# Altium PCB PCB1.PcbDoc (part 1 of 3)
Units mm, origin at the board's own origin, x right, y up, seen from the top; angles counter-clockwise.
Board outline 77.5 x 89.25 mm, 4 copper layers (Top Layer, Layer 1, Layer 2, Bottom Layer), stack 0.603 mm thick; 122 components, 112 nets, 561 pads, 302 vias.
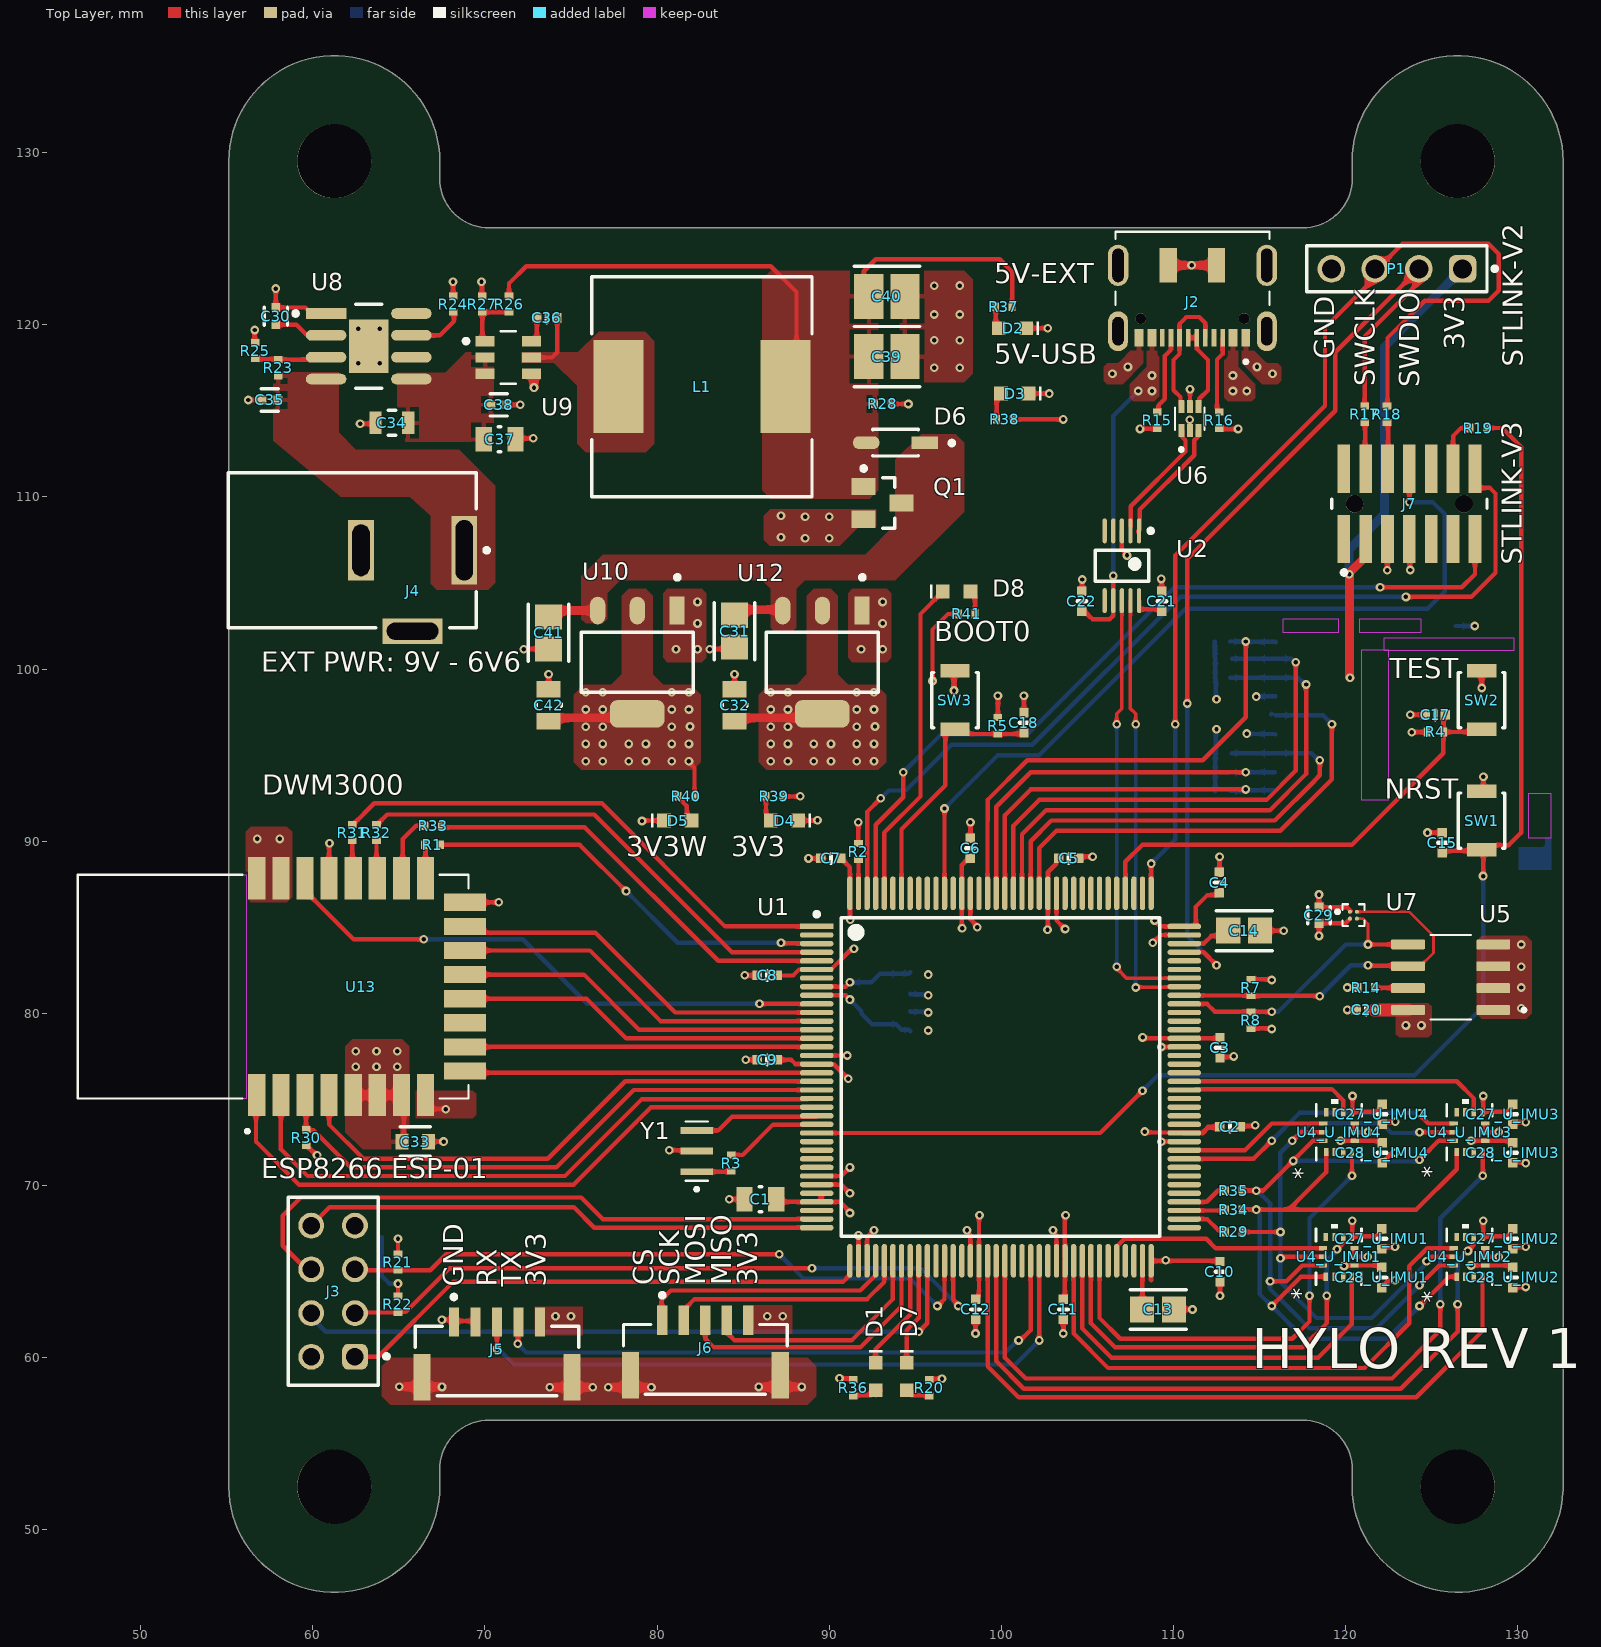
[diagram p0: Top Layer view]
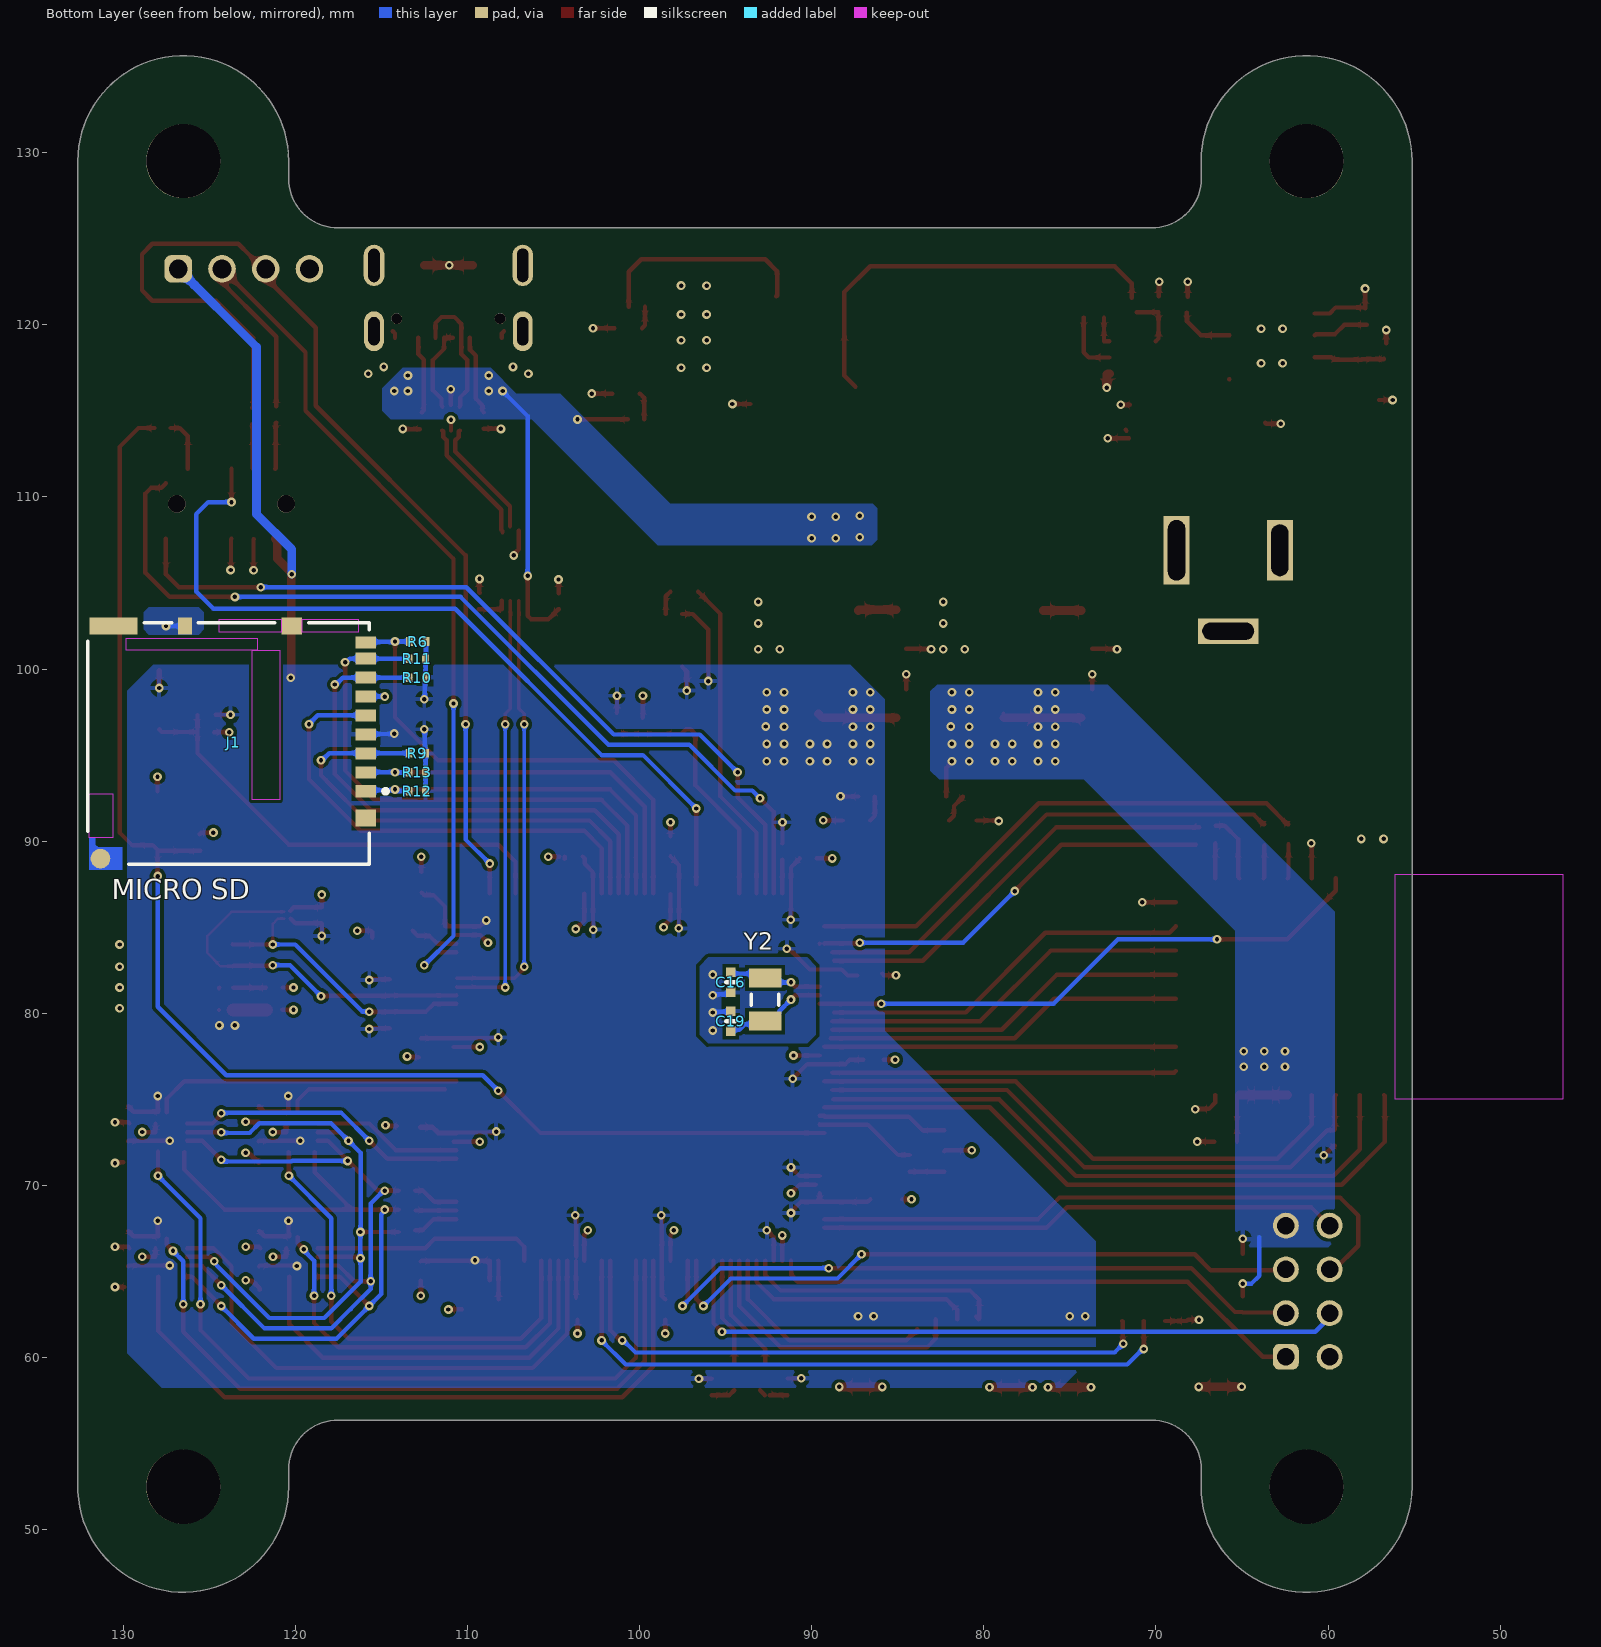
[diagram p1: Bottom Layer view, seen from below]
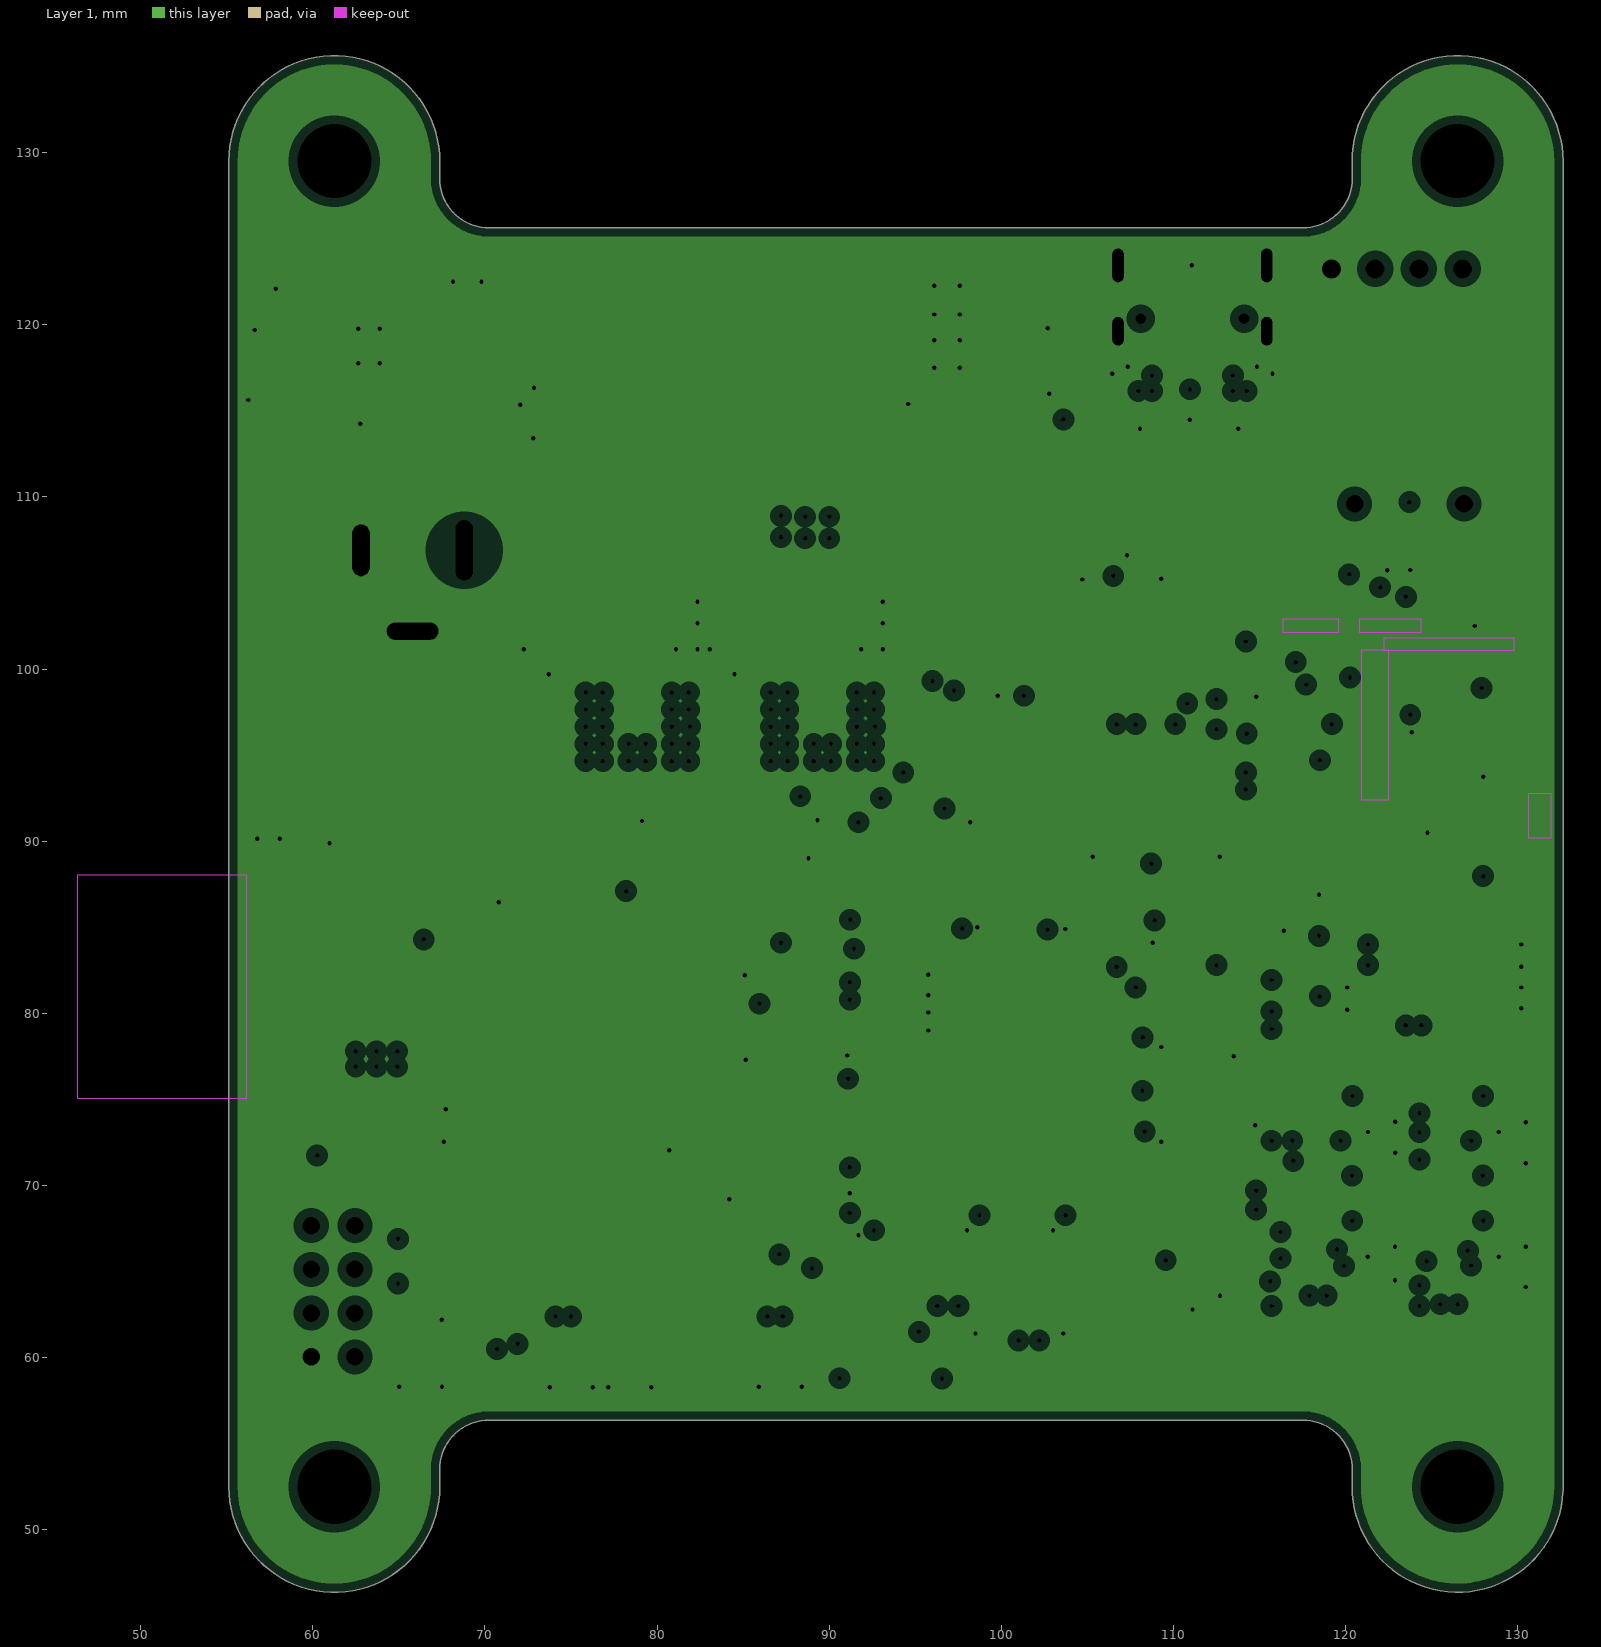
[diagram p2: Layer 1, clearances drawn from the general rule]
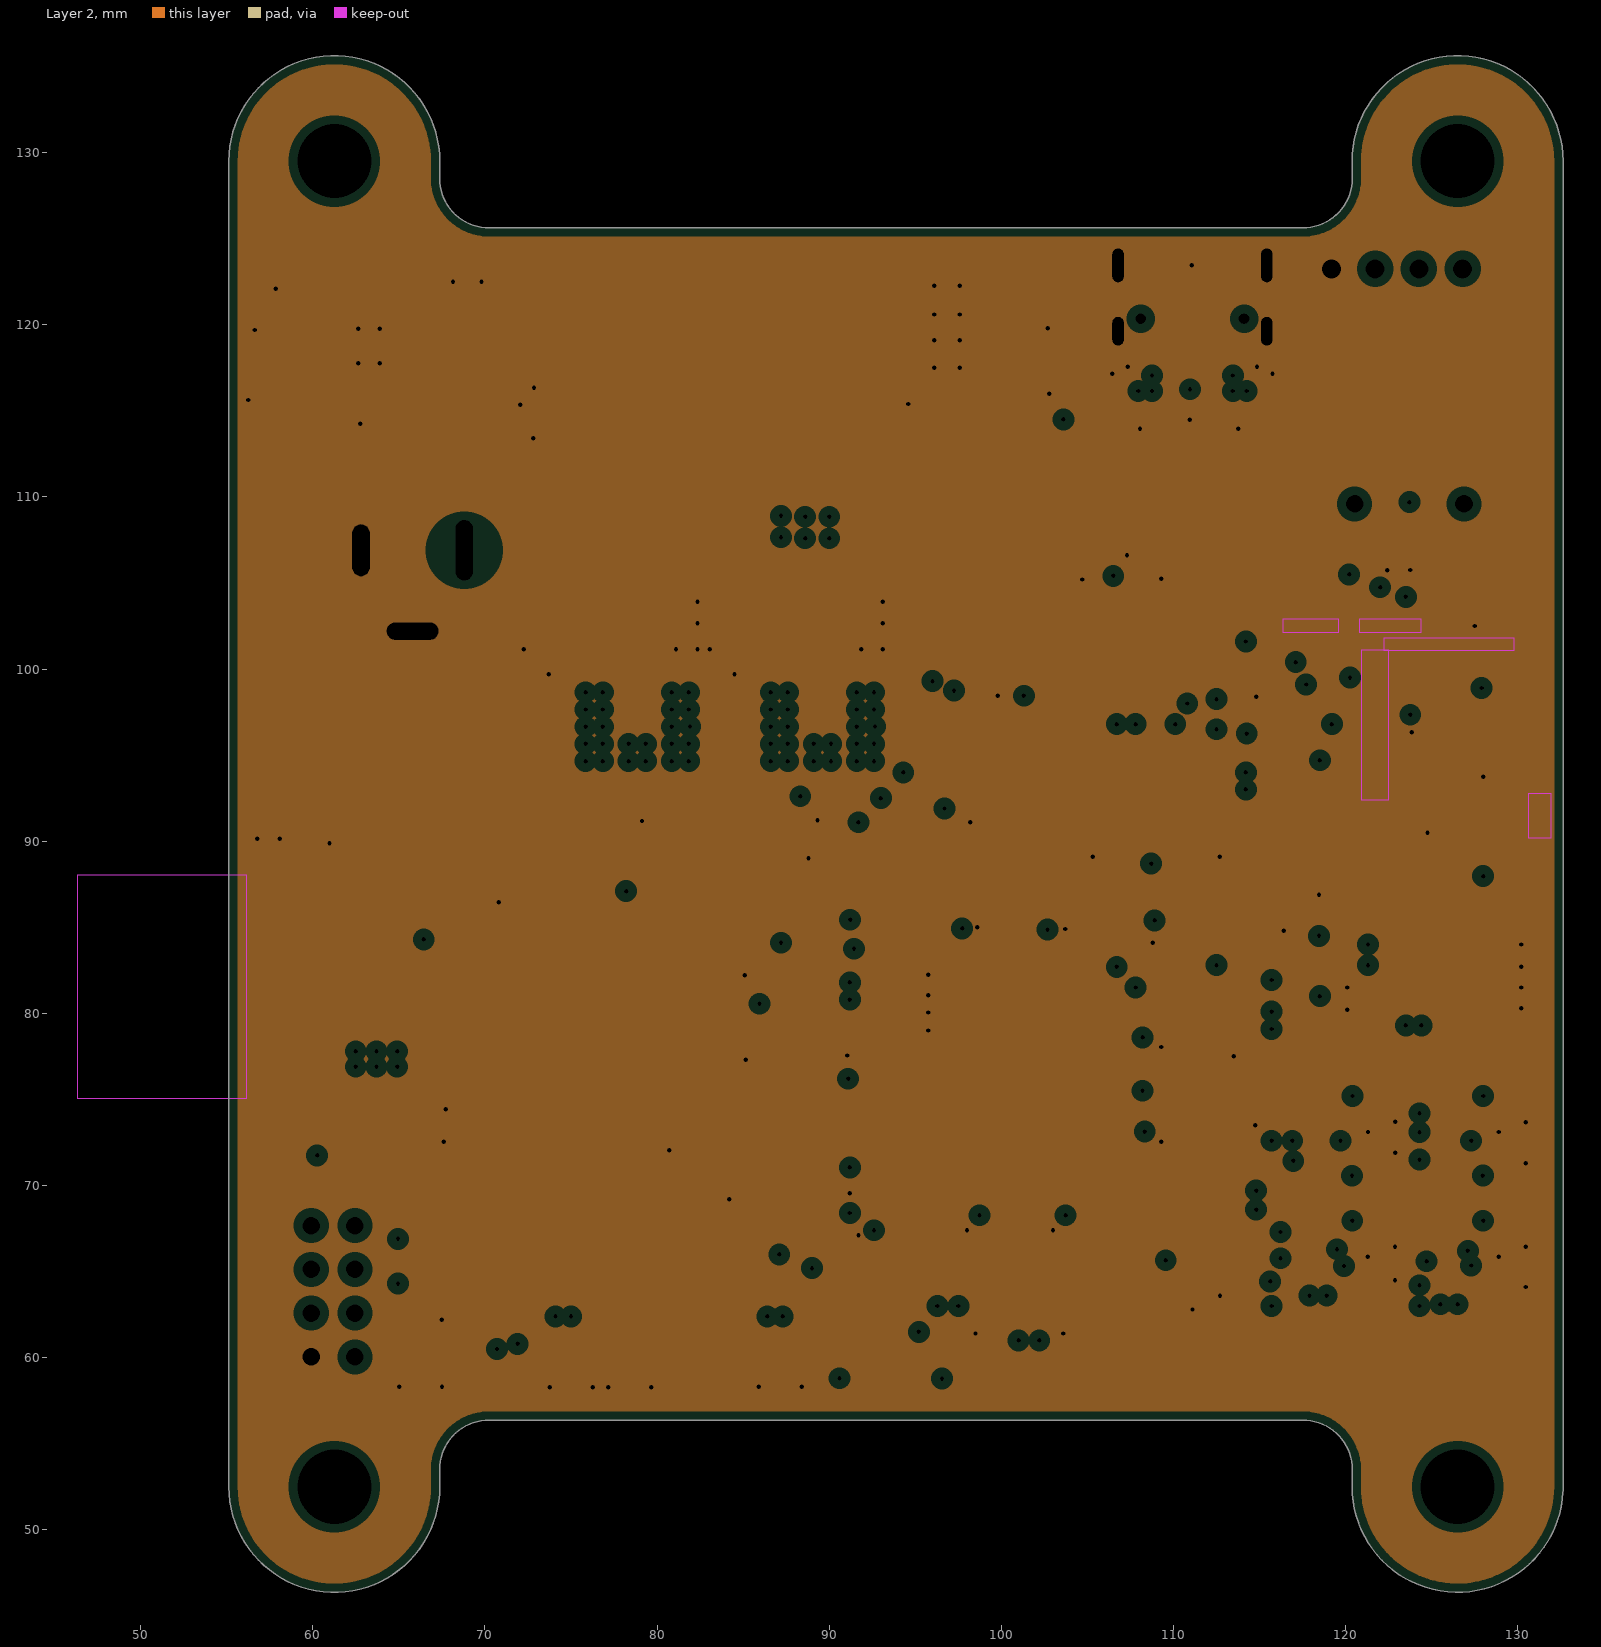
[diagram p3: Layer 2, clearances drawn from the general rule]
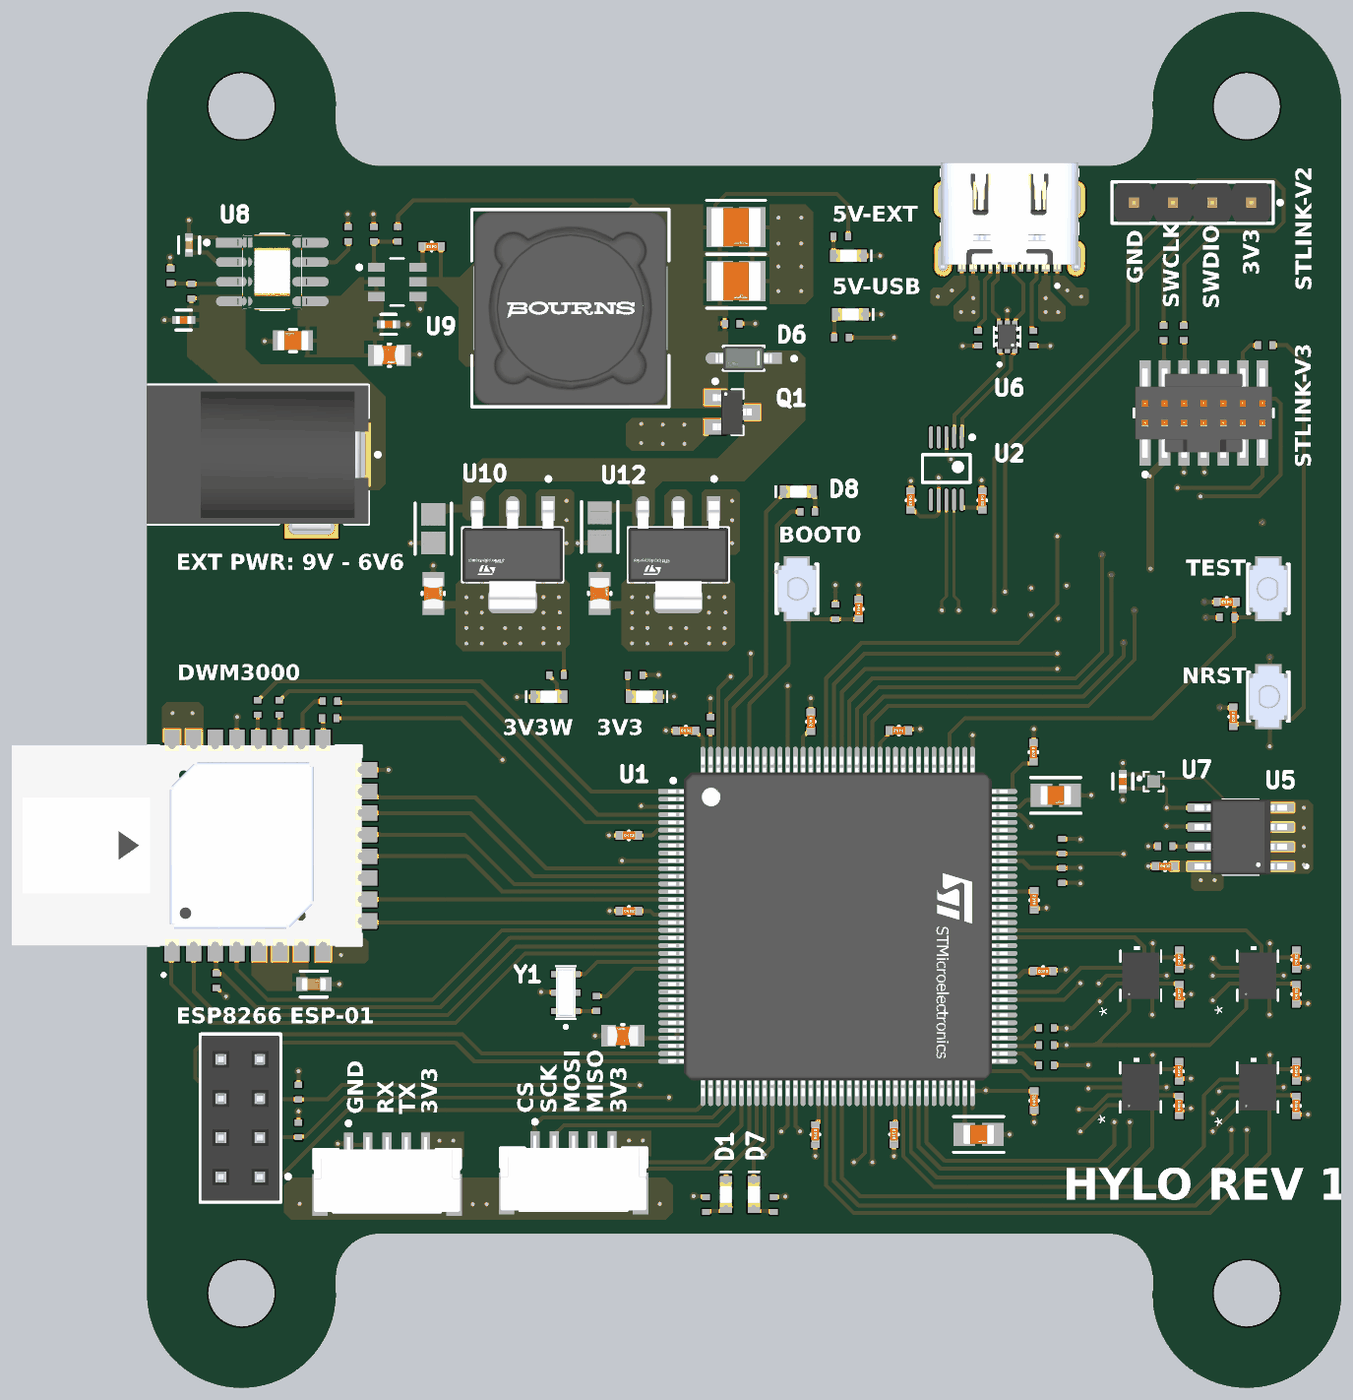
[diagram p5: 3D render of the assembled board from above, using the file's embedded part models]

## Layer stack, top to bottom
Top Solder: solder mask 0.0102, Solder Resist, Dk 3.5
Top Layer: signal copper 0.0356
Dielectric 2: prepreg 0.0711, PP-006, Dk 4.1
Layer 1: plane copper 0.035, net GND
Dielectric 1: dielectric 0.32, FR-4, Dk 4.8
Layer 2: plane copper 0.035, net GND
Dielectric 3: prepreg 0.0711, PP-006, Dk 4.1
Bottom Layer: signal copper 0.0356
Bottom Solder: solder mask 0.0102, Solder Resist, Dk 3.5

## Board outline
55.123,52.5 55.123,74.5 55.123,107.5 55.123,110.501 55.123,129.498 55.123,129.5 cw(c61.25,129.5) 67.377,129.5 67.366,129.448 67.366,128.5 ccw(c70.239,128.5) 70.248,125.627 70.25,125.627 117.5,125.627 117.501,125.627 ccw(c117.511,128.5) 120.384,128.5 120.384,129.448 120.373,129.5 cw(c126.5,129.5) 132.627,129.5 132.627,129.499 132.627,79.75 132.627,52.25 132.62,52.209 cw(c126.5,52.5) 120.373,52.5 120.384,52.552 120.384,53.5 ccw(c117.511,53.5) 117.501,56.373 117.5,56.373 70.25,56.373 70.249,56.373 ccw(c70.239,53.5) 67.366,53.5 67.366,52.552 67.377,52.5 cw(c61.25,52.5)

## Design rules (kind name [scope] priority, off if disabled: settings)
Clearance [All] p1: gap=0.2 ignorepadtopadclearanceinfootprint=FALSE except(0.076: Arc-SMDPad Track-SMDPad SMDPad-SMDPad; 0.127: Arc-Via Track-Via SMDPad-Via THPad-Via Via-Via; 0.15: Arc-Arc Arc-Track Arc-Text Track-Track Track-Text SMDPad-Text THPad-Text Via-Text Fill-Text Poly-Text Region-Text Text-Text)
DiffPairsRouting [InDifferentialPair('USB')] p1: maxlimit=0.254 minlimit=0.254 mostfreqgap=0.254 toplayer_minwidth=0.254 toplayer_maxwidth=0.381 toplayer_prefwidth=0.254 bottomlayer_minwidth=0.254 bottomlayer_maxwidth=0.381 bottomlayer_prefwidth=0.254 maxuncoupledlength=12.7
HoleSize [All] p1: absolutevalues=TRUE maxlimit=1651.532 minlimit=0.025 maxpercent=80.000 minpercent=20.000
MinimumSolderMaskSliver [All] p1: minsoldermaskwidth=0.1
PlaneClearance [All] p1: clearance=0.508
PlaneConnect [All] p1: planeconnectstyle=Relief reliefexpansion=0.508 reliefentries=4 reliefconductorwidth=0.254 reliefairgap=0.254
PolygonConnect [All] p1: connectstyle=Relief reliefconductorwidth=0.254 reliefentries=4 polygonreliefangle="90 Angle" airgapwidth=0.254
RoomDefinition U_IMU4 [InComponentClass('U_IMU4')] p1: confinementstyle=ConfineIn formatcopy=TRUE lockcomponents=FALSE outline 115.114,68.144 125.114,68.144 125.114,77.644 115.114,77.644
RoomDefinition U_IMU3 [InComponentClass('U_IMU3')] p2: confinementstyle=ConfineIn formatcopy=TRUE lockcomponents=FALSE outline 122.7,68.144 132.7,68.144 132.7,77.644 122.7,77.644
RoomDefinition U_IMU2 [InComponentClass('U_IMU2')] p3: confinementstyle=ConfineIn formatcopy=TRUE lockcomponents=FALSE outline 122.7,60.9 132.7,60.9 132.7,70.4 122.7,70.4
RoomDefinition U_IMU1 [InComponentClass('U_IMU1')] p4: confinementstyle=ConfineIn formatcopy=TRUE lockcomponents=FALSE outline 115.1,60.9 125.1,60.9 125.1,70.4 115.1,70.4
RoutingVias [All] p1: holewidth=0.254 width=0.508 viastyle="Through Hole" minholewidth=0.254 minwidth=0.5 maxholewidth=0.8 maxwidth=1
SilkToSilkClearance [All] p1: silktosilkclearance=0.2
SilkToSolderMaskClearance [IsPad] p1: minsilkscreentomaskgap=0.16 clearancetoexposedcopper=TRUE
SolderMaskExpansion [All] p1: expansion=0.102 istentingtop=FALSE
Width [All] p1: maxlimit=3 minlimit=0.127 preferedwidth=0.254
23 further rules are at their usual default settings.

## Classes and differential pairs
net class BMI_INT2[1..4]: BMI_INT21 BMI_INT22 BMI_INT23 BMI_INT24
net class BMI_INT1[1..4]: BMI_INT11 BMI_INT12 BMI_INT13 BMI_INT14
channel class IMU: U_IMU1 U_IMU2 U_IMU3 U_IMU4
net class BMI_CS[1..4]: BMI_CS1 BMI_CS2 BMI_CS3 BMI_CS4
component class U_Wireless+other: C29 C33 J3 R1 R21 R22 R30 R31 R32 R33 U7 U13
component class U_Storage: C20 J1 R6 R9 R10 R11 R12 R13 R14 U5
component class U_Power: C30 C31 C32 C34 C35 C36 C37 C38 C39 C40 C41 C42 D2 D3 D4 D5 D6 L1 Q1 R23 R24 R25 R26 R27 R28 R37 R38 R39 R40 U8 U9 U10 U12
component class U_MCU: C1 C2 C3 C4 C5 C6 C7 C8 C9 C10 C11 C12 C13 C14 C15 C16 C17 C18 C19 D1 D7 D8 R2 R3 R4 R5 R7 R8 R20 R29 R34 R35 R36 R41 s SW1 SW2 SW3 U1 Y1 Y2
component class U_Interface: C21 C22 J2 J5 J6 J7 P1 R15 R16 R17 R18 R19 U2 U6
component class U_IMU4: C27_U_IMU4 C28_U_IMU4 U4_U_IMU4
component class U_IMU3: C27_U_IMU3 C28_U_IMU3 U4_U_IMU3
component class U_IMU2: C27_U_IMU2 C28_U_IMU2 U4_U_IMU2
component class U_IMU1: C27_U_IMU1 C28_U_IMU1 U4_U_IMU1
component class Top_level: J4
differential pair USB: +USB_P -USB_N

## Components (designator, comment, footprint, x,y, rotation, side; value= is the part's Value field where it differs from the comment)
C1 "CC0805KKX7R8BB475" FP-CC0805-0_85-MFG 86,69.2 r180 top value="4.7 uF"
C2 "GRM155R61A104KA01J" SMD-0402C 113.28,73.4 r90 top value=0.10µF
C3 "GRM155R61A104KA01J" SMD-0402C 112.7,78 r0 top value=0.10µF
C4 "GRM155R61A104KA01J" SMD-0402C 112.65,87.6 r180 top value=0.10µF
C5 "GRM155R61A104KA01J" SMD-0402C 103.916,89.004 r90 top value=0.10µF
C6 "GRM155R61A104KA01J" SMD-0402C 98.2,89.584 r180 top value=0.10µF
C7 "GRM155R61A104KA01J" SMD-0402C 90.1,89 r270 top value=0.10µF
C8 "GRM155R61A104KA01J" SMD-0402C 86.4,82.2 r270 top value=0.10µF
C9 "GRM155R61A104KA01J" SMD-0402C 86.4,77.3 r270 top value=0.10µF
C10 "GRM155R61A104KA01J" SMD-0402C 112.7,65 r0 top value=0.10µF
C11 "GRM155R61A104KA01J" SMD-0402C 103.6,62.8 r0 top value=0.10µF
C12 "GRM155R61A104KA01J" SMD-0402C 98.5,62.8 r0 top value=0.10µF
C13 "GRM21BR71E225KE11L" FP-GRM21B-0_15-IPC_A 109.1,62.8 r0 top
C14 "GRM21BR71E225KE11L" FP-GRM21B-0_15-IPC_A 114.1,84.8 r0 top
C15 "GRM155R61A104KA01J" SMD-0402C 125.62,89.9 r180 top value=0.10µF
C16 "GRM1555C1H150FA01D" SMD-0402C 94.7,81.8 r0 bottom value=15pF
C17 "GRM155R61A104KA01J" SMD-0402C 125.2,97.346 r90 top value=0.10µF
C18 "GRM155R61A104KA01J" SMD-0402C 101.314,96.882 r180 top value=0.10µF
C19 "GRM1555C1H150FA01D" SMD-0402C 94.7,79.55 r180 bottom value=15pF
C20 "GRM155R61A104KA01J" SMD-0402C 121.2,80.2 r270 top value=0.10µF
C21 "GRM155R61A104KA01J" SMD-0402C 109.327,103.934 r180 top value=0.10µF
C22 "GRM155R61A104KA01J" SMD-0402C 104.677,103.934 r180 top value=0.10µF
C27_U_IMU1 "GRM155R61A104KA01J" SMD-0402C 122.1,66.896 r0 top value=0.10µF (schematic designator C27)
C27_U_IMU2 "GRM155R61A104KA01J" SMD-0402C 129.7,66.896 r0 top value=0.10µF (schematic designator C27)
C27_U_IMU3 "GRM155R61A104KA01J" SMD-0402C 129.7,74.14 r0 top value=0.10µF (schematic designator C27)
C27_U_IMU4 "GRM155R61A104KA01J" SMD-0402C 122.114,74.14 r0 top value=0.10µF (schematic designator C27)
C28_U_IMU1 "GRM155R61A104KA01J" SMD-0402C 122.1,64.656 r0 top value=0.10µF (schematic designator C28)
C28_U_IMU2 "GRM155R61A104KA01J" SMD-0402C 129.7,64.656 r0 top value=0.10µF (schematic designator C28)
C28_U_IMU3 "GRM155R61A104KA01J" SMD-0402C 129.7,71.9 r0 top value=0.10µF (schematic designator C28)
C28_U_IMU4 "GRM155R61A104KA01J" SMD-0402C 122.114,71.9 r0 top value=0.10µF (schematic designator C28)
C29 "GRM155R61A225KE95D" FP-GRM155-0_05-MFG 118.45,85.7 r90 top
C30 "CC0402KRX7R6BB103" FP-CC0402-MFG 57.85,120.5 r90 top value="10 nF"
C31 "CL21B105KOFNNNE" FP-CL21-IPC_A 84.5,102.2 r270 top
C32 "CC0805KKX7R8BB475" FP-CC0805-0_85-MFG 84.5,97.9 r90 top value="4.7 uF"
C33 "GRM188R61A106KE69D" FP-GRM18-0_15-MFG 65.95,72.55 r0 top value=10uF
C34 "GRM21BC71E106KE11L" FP-GRM21B-0_2-e0_2_0_7-MFG 64.597,114.302 r180 top
C35 "GRM155R61E104KA87D" FP-GRM155-0_05-MFG 57.5,115.63 r180 top
C36 "GRM155R61A104KA01J" SMD-0402C 73.6,120.4 r90 top value=0.10µF
C37 "CC0805KKX7R8BB475" FP-CC0805-0_85-MFG 70.85,113.35 r0 top value="4.7 uF"
C38 "GRM155R61E104KA87D" FP-GRM155-0_05-MFG 70.8,115.35 r0 top
C39 "GRM32ER61C476KE15L" FP-GRM32E-0_3-0_2-IPC_C 93.35,118.15 r0 top
C40 "GRM32ER61C476KE15L" FP-GRM32E-0_3-0_2-IPC_C 93.35,121.65 r0 top
C41 "CL21B105KOFNNNE" FP-CL21-IPC_A 73.7,102.1 r270 top
C42 "CC0805KKX7R8BB475" FP-CC0805-0_85-MFG 73.7,97.9 r90 top value="4.7 uF"
D1 "150060BS75000" WL-SMCW_0603_150060xx75000 92.7,58.9 r270 top
D2 "150060RS75000" WL-SMCW_0603_150060xx75000 100.65,119.8 r180 top
D3 "150060RS75000" WL-SMCW_0603_150060xx75000 100.775,116 r180 top
D4 "150060VS75000" WL-SMCW_0603_150060xx75000 87.4,91.2 r180 top
D5 "150060VS75000" WL-SMCW_0603_150060xx75000 81.2,91.2 r0 top
D6 "1N5819HW-7-F" FP-SOD123-IPC_A 93.85,113.15 r180 top
D7 "150060BS75000" WL-SMCW_0603_150060xx75000 94.5,58.9 r270 top
D8 "150060BS75000" WL-SMCW_0603_150060xx75000 97.4,104.5 r0 top
J1 "DM3AT-SF-PEJM5" FP-DM3AT-SF-PEJM5-MFG 123.875,95.675 r270 bottom locked
J2 "DX07S016JA1R1500" JAE_DX07S016JA1R1500 111.1,120.35 r180 top
J3 "61300821821" 61300821821 61.18,63.86 r90 top
J4 "PJ-002A" CUI-PJ-002A_V 65.8,106.9 r180 top
J5 "SM05B-GHS-TB(LF)(SN)" FP-SM05B-GHS-TB_LF_SN-MFG 70.7,59.8 r0 top
J6 "SM05B-GHS-TB(LF)(SN)" FP-SM05B-GHS-TB_LF_SN-MFG 82.8,59.9 r0 top
J7 "FTSH-107-01-L-DV-K-A" FP-FTSH-107-01-L-DV-K-A-MFG 123.7,109.6 r0 top
L1 "SRR1260-150M" FP-SRR1260-MFG 82.6,116.4 r0 top
P1 "61300411121" 61300411121 122.98,123.25 r180 top
Q1 "FDN304P" FAIR-SSOT3L-3_V 93.1,109.65 r0 top
R1 "0R" "IPC C R0402 NO SILK" 66.95,89.8 r180 top
R2 "10k" "IPC C R0402 NO SILK" 91.7,89.4 r270 top
R3 "0R" "IPC C R0402 NO SILK" 84.3,71.3 r90 top value=0
R4 "10k" "IPC C R0402 NO SILK" 125.215,96.346 r0 top
R5 "10k" "IPC C R0402 NO SILK" 99.8,96.7 r270 top
R6 "10k" "IPC C R0402 NO SILK" 112.875,101.6 r180 bottom
R7 "10k" "IPC C R0402 NO SILK" 114.5,81.5 r270 top
R8 "10k" "IPC C R0402 NO SILK" 114.5,79.6 r90 top
R9 "33k" "IPC C R0402 NO SILK" 112.9,95.1 r180 bottom
R10 "33k" "IPC C R0402 NO SILK" 112.9,99.5 r180 bottom
R11 "33k" "IPC C R0402 NO SILK" 112.9,100.6 r180 bottom
R12 "33k" "IPC C R0402 NO SILK" 112.9,92.9 r180 bottom
R13 "33k" "IPC C R0402 NO SILK" 112.9,94 r180 bottom
R14 "10k" "IPC C R0402 NO SILK" 121.2,81.5 r180 top
R15 "5.1k" "IPC C R0402 NO SILK" 109.05,114.45 r270 top value=5k1
R16 "5.1k" "IPC C R0402 NO SILK" 112.65,114.45 r270 top value=5k1
R17 "0R" "IPC C R0402 NO SILK" 121.1,114.8 r90 top
R18 "0R" "IPC C R0402 NO SILK" 122.4,114.8 r90 top
R19 "0R" "IPC C R0402 NO SILK" 127.7,114 r0 top
R20 "470R" "IPC C R0402 NO SILK" 95.8,58.252 r90 top
R21 "10k" "IPC C R0402 NO SILK" 64.95,65.55 r270 top
R22 "10k" "IPC C R0402 NO SILK" 64.95,63.1 r270 top
R23 "49.9k 1%" "IPC C R0402 NO SILK" 58,117.5 r270 top value=49k9
R24 "1k 1%" "IPC C R0402 NO SILK" 68.167,121.2 r270 top value=1k
R25 "10k 1%" "IPC C R0402 NO SILK" 56.65,118.5 r270 top value=10k
R26 "100k 1%" "IPC C R0402 NO SILK" 71.4,121.2 r90 top value=100k
R27 "19.1k 1%" "IPC C R0402 NO SILK" 69.85,121.2 r90 top value=19k1
R28 "10k" "IPC C R0402 NO SILK" 93.1,115.4 r180 top
R29 "0R" "IPC C R0402 NO SILK" 113.5,67.3 r180 top
R30 "10k" "IPC C R0402 NO SILK" 59.61,72.783 r270 top
R31 "0R" "IPC C R0402 NO SILK" 62.3,90.5 r270 top
R32 "0R" "IPC C R0402 NO SILK" 63.7,90.5 r270 top
R33 "0R" "IPC C R0402 NO SILK" 67,90.9 r180 top
R34 "0R" "IPC C R0402 NO SILK" 113.5,68.6 r180 top
R35 "0R" "IPC C R0402 NO SILK" 113.5,69.7 r180 top
R36 "470R" "IPC C R0402 NO SILK" 91.4,58.252 r90 top
R37 "470R" "IPC C R0402 NO SILK" 100.15,121.05 r180 top
R38 "470R" "IPC C R0402 NO SILK" 100.2,114.5 r180 top
R39 "470R" "IPC C R0402 NO SILK" 86.8,92.6 r180 top
R40 "470R" "IPC C R0402 NO SILK" 81.7,92.6 r180 top
R41 "470R" "IPC C R0402 NO SILK" 98,103.2 r180 top
SW1 "B3U-1000P" FP-B3U-1000P-MFG 127.9,91.2 r90 top
SW2 "B3U-1000P" FP-B3U-1000P-MFG 127.9,98.2 r270 top
SW3 "B3U-1000P" FP-B3U-1000P-MFG 97.3,98.2 r90 top
U1 "STM32H723ZGT6" FP-LQFP144-1A-IPC_A 99.95,76.3 r0 top locked
U2 "CH340E" MSOP-UN10_L 107,106 r270 top
U4_U_IMU1 "BMI323" BMI323_BOS 119.6,65.856 r90 top (schematic designator U4)
U4_U_IMU2 "BMI323" BMI323_BOS 127.2,65.856 r90 top (schematic designator U4)
U4_U_IMU3 "BMI323" BMI323_BOS 127.2,73.1 r90 top (schematic designator U4)
U4_U_IMU4 "BMI323" BMI323_BOS 119.614,73.1 r90 top (schematic designator U4)
U5 "M24C64-RMN6TP" SOIC127P600X175-8N 126.1,82.1 r180 top
U6 "USBLC6-2P6" SOT50P160X60-6N 110.95,114.55 r90 top
U7 "MMC5603NJ" XDCR_MMC5603NJ 120.45,85.7 r0 top
U8 "TPS259621DDAR" FP-DDA0008J-IPC_A 63.25,118.75 r0 top
U9 "LMR51625XDDCR" DDC0006A-MFG 71.35,118.1 r0 top
U10 "LDL1117S33R" FP-SOT223-0046067-IPC_C 78.85,100.4 r270 top
U12 "LDL1117S33R" FP-SOT223-0046067-IPC_C 89.6,100.4 r270 top
U13 "DWM3000TR13" XCVR_DWM3000TR13 57.7,81.55 r90 top locked
Y1 "CSTNE8M00G550000R0" OSC_CSTNE8M00G550000R0 82.3,72 r90 top
Y2 "ABS07-32.768KHZ-T" FP-ABS07-MFG 92.7,80.8 r90 bottom

## Footprints (in the part's own frame and the unit in brackets; to place one, negate y for a bottom-side part, rotate by r counter-clockwise, add the part's x,y. Pads: shape width x height; smd on the part's side, far side on the other; paste and mask are expansions set on the pad)
61300411121 [mm] "Pin Header, pitch 2.54 mm, THT, Vertical, single row, 4p"
  rrect50% 1.6x1.6 hole 1.1: 1(-3.81,0)
  round 1.6 hole 1.1: 2(-1.27,0) 3(1.27,0) 4(3.81,0)
  silkscreen extent -5.8,-1.35 5.23,1.35, body extent -5.08,-1.27 5.08,1.27, height 8.57
61300821821 [mm] "Socket Header, Pitch 2.54 mm, THT, Vertical, dual row, 8p"
  rrect50% 1.5x1.5 hole 1.02: 1(-3.81,-1.27)
  round 1.5 hole 1.02: 2(-3.81,1.27) 3(-1.27,-1.27) 4(-1.27,1.27) 5(1.27,-1.27) 6(1.27,1.27) 7(3.81,-1.27) 8(3.81,1.27)
  silkscreen extent -5.46,-3.22 5.46,2.62, body extent -5.33,-2.54 5.33,2.54, height 8.45
BMI323_BOS [mil]
  rect 19x10 smd paste+0 mask+0: 1(-45.5,29.53) 2(-45.5,9.84) 3(-45.5,-9.84) 4(-45.5,-29.53) 8(45.5,-29.53) 9(45.5,-9.84) 10(45.5,9.84) 11(45.5,29.53)
  rect 10x19 smd paste+0 mask+0: 5(-19.68,-36) 6(0,-36) 7(19.68,-36) 12(19.68,36) 13(0,36) 14(-19.68,36)
  silkscreen extent -64,-52 75,52, body extent -59,-47 59,47, height 34
CUI-PJ-002A_V [mm] "THD, 3-Leads, Body 14.4x9mm, Height 11mm"
  rect 1.5x4 hole 1 slot 3.5 at 90 deg: 1(-3,0)
  rect 1.5x3.5 hole 1 slot 3 at 90 deg: 2(3,0)
  rect 3.5x1.5 hole 1 slot 3 at 0 deg: 3(0,4.7)
  silkscreen extent -4.43,-4.5 10.7,4.5, body extent -3.7,-4.5 10.7,4.9, height 11
DDC0006A-MFG [mm]
  rect 1.1x0.6 smd paste+0 mask+0: 1(-1.35,0.95) 2(-1.35,0) 3(-1.35,-0.95) 4(1.35,-0.95) 5(1.35,0) 6(1.35,0.95)
  silkscreen extent -2.57,-1.53 0.42,1.53
FAIR-SSOT3L-3_V [mm] "SOT23, 3-Leads, Body 2.92x1.4mm, Pitch 0.95mm"
  rect 1.4x1 smd: 1(-1.1,0.95) 2(-1.1,-0.95) 3(1.1,0)
  silkscreen extent -1.22,-1.46 0.7,2.12, body extent -1.26,-1.46 1.26,1.46, height 1.12
FP-ABS07-MFG [mm]
  rect 1.1x1.9 smd paste+0 mask+0: 1(-1.25,0) 2(1.25,0)
  silkscreen extent -0.33,-0.8 0.33,0.8, body extent -1.6,-0.75 1.6,0.75, height 0.9
FP-B3U-1000P-MFG [mm]
  rect 0.8x1.7 smd paste+0 mask+0: 1(-1.7,0) 2(1.7,0)
  silkscreen extent -1.6,-1.35 1.6,1.35, body extent -2.2,-1.45 2.2,1.45, height 0.25
FP-CC0402-MFG [mm]
  rect 0.5x0.5 smd paste+0 mask+0: 1(-0.5,0) 2(0.5,0)
  silkscreen extent -0.53,-0.68 0.53,0.67, body extent -0.87,-0.48 0.87,0.48, height 0.25
FP-CC0805-0_85-MFG [mm]
  rect 0.95x1.4 smd paste+0 mask+0: 1(-0.925,0) 2(0.925,0)
  silkscreen extent -0.08,-0.72 0.08,0.72, body extent -1.6,-1.05 1.6,1.05, height 0.25
FP-CL21-IPC_A [mm]
  rect 1.455x1.556 smd paste+0 mask+0: 1(-0.926,0) 2(0.926,0)
  silkscreen extent -1.65,-1.18 1.65,1.18, body extent -2.15,-1.28 2.15,1.28, height 0.25
FP-DDA0008J-IPC_A [mm]
  rect 2.353x0.622 smd paste+0 mask+0: 1(-2.477,1.905)
  rrect100% 2.353x0.622 smd paste+0 mask+0: 2(-2.477,0.635) 3(-2.477,-0.635) 4(-2.477,-1.905) 5(2.477,-1.905) 6(2.477,-0.635) 7(2.477,0.635) 8(2.477,1.905)
  rect 2.3x3.1 smd paste-1000 mask+0: 9(0,0)
  silkscreen extent -4.37,-2.45 0.75,2.45, body extent -3,-2.45 3,2.45, height 1.7
FP-DM3AT-SF-PEJM5-MFG [mm]
  rect 0.7x1.2 smd paste+0 mask+0: 1(2.775,7.975) 2(1.675,7.975) 3(0.575,7.975) 4(-0.525,7.975) 5(-1.625,7.975) 6(-2.725,7.975) 7(-3.825,7.975) 8(-4.925,7.975) 9(-5.875,7.975)
  rect 1x0.8 smd paste+0 mask+0: 10(-6.825,-2.525)
  rect 1x1.2 smd paste+0 mask+0: 11(4.325,7.975) 12(-6.825,3.675)
  rect 1x2.8 smd paste+0 mask+0: 13(-6.825,-6.675)
  round 1.145 smd paste+0 mask+0: 14(6.689,-7.439)
  Top Layer region: 6.025,-6.175 7.325,-6.175 7.325,-8.075 5.475,-8.075 5.475,-7.725 5.875,-7.725 6.025,-7.575 6.025,-6.175
  Keep-Out Layer region: 2.924,-6.724 5.474,-6.724 5.474,-8.074 2.924,-8.074
  Keep-Out Layer region: -7.225,3.075 -6.475,3.075 -6.475,-0.525 -7.225,-0.525
  Keep-Out Layer region: -7.225,7.525 -6.475,7.525 -6.475,4.275 -7.225,4.275
  Keep-Out Layer region: -6.125,1.674 -5.425,1.674 -5.425,-5.926 -6.125,-5.926
  Keep-Out Layer region: -5.425,2.975 3.275,2.975 3.275,1.375 -5.425,1.375
  silkscreen extent -7.02,-8.18 7.02,9.25, body extent -6.93,-8.07 6.92,8.08, height 1.83
FP-FTSH-107-01-L-DV-K-A-MFG [mm]
  rect 0.74x2.79 smd paste+0 mask+0: 1(-3.81,-2.035) 2(-3.81,2.035) 3(-2.54,-2.035) 4(-2.54,2.035) 5(-1.27,-2.035) 6(-1.27,2.035) 7(0,-2.035) 8(0,2.035) 9(1.27,-2.035) 10(1.27,2.035) 11(2.54,-2.035) 12(2.54,2.035) 13(3.81,-2.035) 14(3.81,2.035)
  round 1.02 hole 1.02 unplated paste-1000 mask+0: ""(-3.175,0) ""(3.175,0)
  silkscreen extent -4.51,-4.11 4.51,0.27, body extent -4.61,-3.53 4.61,3.53, height 0.25
FP-GRM18-0_15-MFG [mm]
  rect 0.75x0.9 smd paste+0 mask+0: 1(-0.775,0) 2(0.775,0)
  silkscreen extent -0.88,-0.83 0.87,0.85, body extent -1.25,-0.58 1.25,0.58, height 0.25
FP-GRM21B-0_2-e0_2_0_7-MFG [mm]
  rect 0.7x1.3 smd paste+0 mask+0: 1(-0.95,0) 2(0.95,0)
  silkscreen extent -0.23,-0.72 0.23,0.72, body extent -1.4,-0.82 1.4,0.82, height 0.25
FP-GRM21B-0_15-IPC_A [mm]
  rect 1.406x1.508 smd paste+0 mask+0: 1(-0.926,0) 2(0.926,0)
  silkscreen extent -1.63,-1.15 1.63,1.15, body extent -2.13,-1.25 2.13,1.25, height 0.25
FP-GRM32E-0_3-0_2-IPC_C [mm]
  rect 1.703x2.606 smd paste+0 mask+0: 1(-1.051,0) 2(1.051,0)
  silkscreen extent -1.9,-1.75 1.9,1.75, body extent -2,-1.45 2,1.45, height 0.25
FP-GRM155-0_05-MFG [mm]
  rect 0.55x0.5 smd paste+0 mask+0: 1(-0.475,0) 2(0.475,0)
  silkscreen extent -0.5,-0.65 0.5,0.65, body extent -0.85,-0.38 0.85,0.38, height 0.25
FP-LQFP144-1A-IPC_A [mm]
  rect 1.955x0.312 smd paste+0 mask+0: 1(-10.675,8.75)
  rrect100% 1.955x0.312 smd paste+0 mask+0: 2(-10.675,8.25) 3(-10.675,7.75) 4(-10.675,7.25) 5(-10.675,6.75) 6(-10.675,6.25) 7(-10.675,5.75) 8(-10.675,5.25) 9(-10.675,4.75) 10(-10.675,4.25) 11(-10.675,3.75) 12(-10.675,3.25) 13(-10.675,2.75) 14(-10.675,2.25) 15(-10.675,1.75) 16(-10.675,1.25) 17(-10.675,0.75) 18(-10.675,0.25) 19(-10.675,-0.25) 20(-10.675,-0.75) 21(-10.675,-1.25) 22(-10.675,-1.75) 23(-10.675,-2.25) 24(-10.675,-2.75) 25(-10.675,-3.25) 26(-10.675,-3.75) 27(-10.675,-4.25) 28(-10.675,-4.75) 29(-10.675,-5.25) 30(-10.675,-5.75) 31(-10.675,-6.25) 32(-10.675,-6.75) 33(-10.675,-7.25) 34(-10.675,-7.75) 35(-10.675,-8.25) 36(-10.675,-8.75) 73(10.675,-8.75) 74(10.675,-8.25) 75(10.675,-7.75) 76(10.675,-7.25) 77(10.675,-6.75) 78(10.675,-6.25) 79(10.675,-5.75) 80(10.675,-5.25) 81(10.675,-4.75) 82(10.675,-4.25) 83(10.675,-3.75) 84(10.675,-3.25) 85(10.675,-2.75) 86(10.675,-2.25) 87(10.675,-1.75) 88(10.675,-1.25) 89(10.675,-0.75) 90(10.675,-0.25) 91(10.675,0.25) 92(10.675,0.75) 93(10.675,1.25) 94(10.675,1.75) 95(10.675,2.25) 96(10.675,2.75) 97(10.675,3.25) 98(10.675,3.75) 99(10.675,4.25) 100(10.675,4.75) 101(10.675,5.25) 102(10.675,5.75) 103(10.675,6.25) 104(10.675,6.75) 105(10.675,7.25) 106(10.675,7.75) 107(10.675,8.25) 108(10.675,8.75)
  rrect100% 0.312x1.955 smd paste+0 mask+0: 37(-8.75,-10.675) 38(-8.25,-10.675) 39(-7.75,-10.675) 40(-7.25,-10.675) 41(-6.75,-10.675) 42(-6.25,-10.675) 43(-5.75,-10.675) 44(-5.25,-10.675) 45(-4.75,-10.675) 46(-4.25,-10.675) 47(-3.75,-10.675) 48(-3.25,-10.675) 49(-2.75,-10.675) 50(-2.25,-10.675) 51(-1.75,-10.675) 52(-1.25,-10.675) 53(-0.75,-10.675) 54(-0.25,-10.675) 55(0.25,-10.675) 56(0.75,-10.675) 57(1.25,-10.675) 58(1.75,-10.675) 59(2.25,-10.675) 60(2.75,-10.675) 61(3.25,-10.675) 62(3.75,-10.675) 63(4.25,-10.675) 64(4.75,-10.675) 65(5.25,-10.675) 66(5.75,-10.675) 67(6.25,-10.675) 68(6.75,-10.675) 69(7.25,-10.675) 70(7.75,-10.675) 71(8.25,-10.675) 72(8.75,-10.675) 109(8.75,10.675) 110(8.25,10.675) 111(7.75,10.675) 112(7.25,10.675) 113(6.75,10.675) 114(6.25,10.675) 115(5.75,10.675) 116(5.25,10.675) 117(4.75,10.675) 118(4.25,10.675) 119(3.75,10.675) 120(3.25,10.675) 121(2.75,10.675) 122(2.25,10.675) 123(1.75,10.675) 124(1.25,10.675) 125(0.75,10.675) 126(0.25,10.675) 127(-0.25,10.675) 128(-0.75,10.675) 129(-1.25,10.675) 130(-1.75,10.675) 131(-2.25,10.675) 132(-2.75,10.675) 133(-3.25,10.675) 134(-3.75,10.675) 135(-4.25,10.675) 136(-4.75,10.675) 137(-5.25,10.675) 138(-5.75,10.675) 139(-6.25,10.675) 140(-6.75,10.675) 141(-7.25,10.675) 142(-7.75,10.675) 143(-8.25,10.675) 144(-8.75,10.675)
  silkscreen extent -10.8,-9.25 9.25,9.58, body extent -12.15,-12.15 12.15,12.15, height 0.25
FP-SM05B-GHS-TB_LF_SN-MFG [mm]
  rect 0.6x1.7 smd paste+0 mask+0: 1(-2.5,2.275) 2(-1.25,2.275) 3(0,2.275) 4(1.25,2.275) 5(2.5,2.275)
  rect 1x2.7 smd paste+0 mask+0: 6(-4.35,-0.925) 7(4.35,-0.925)
  silkscreen extent -4.75,-2.02 4.75,3.85, body extent -4.95,-2.37 4.95,3.22, height 0.25
FP-SOD123-IPC_A [mm]
  rect 1.557x0.742 smd paste+0 mask+0: 1(-1.7,0)
  rrect100% 1.557x0.742 smd paste+0 mask+0: 2(1.7,0)
  silkscreen extent -3.39,-0.77 1.33,0.77, body extent -1.83,-0.77 1.83,0.77, height 1.45
FP-SOT223-0046067-IPC_C [mm]
  rect 1.604x0.88 smd paste+0 mask+0: 1(-3,2.3)
  rrect100% 1.604x0.88 smd paste+0 mask+0: 2(-3,0) 3(-3,-2.3)
  rrect55% 1.604x3.18 smd paste+0 mask+0: 4(3,0)
  silkscreen extent -5.05,-3.25 1.75,3.25, body extent -3.5,-3.25 3.5,3.25, height 1.9
FP-SRR1260-MFG [mm]
  rect 2.9x5.4 smd paste+0 mask+0: 1(-4.85,0) 2(4.85,0)
  silkscreen extent -6.4,-6.4 6.4,6.4, body extent -6.5,-6.5 6.5,6.5, height 0.25
"IPC C R0402 NO SILK" [mm] "Chip Resistor, 2-Leads, Body 1.02x0.51mm, IPC High Density"
  rect 0.4x0.5 smd: 1(-0.475,0) 2(0.475,0)
  body extent -0.51,-0.26 0.51,0.26, height 0.26
JAE_DX07S016JA1R1500 [mm]
  rect 0.508x1 smd mask+0.083: 1(-3.1,1.1)
  rect 0.52x1 smd mask+0.083: 2(-2.35,1.1) 11(2.35,1.1) 12(3.1,1.1)
  rect 0.27x1 smd mask+0.083: 3(-1.75,1.1) 4(-1.25,1.1) 5(-0.75,1.1) 6(-0.25,1.1) 7(0.25,1.1) 8(0.75,1.1) 9(1.25,1.1) 10(1.75,1.1)
  rect 1x2 smd: S1(-1.4,-3.1) S2(1.4,-3.1)
  oval 1.158x2.316 hole 0.65 slot 1.65 at 90 deg: S3(-4.32,0.725) S4(4.32,0.725)
  oval 1.2x2.4 hole 0.65 slot 1.95 at 90 deg: S5(-4.32,-3.1) S6(4.32,-3.1)
  round 0.63 hole 0.63 unplated: ""(-3,0) ""(3,0)
  round 0.6 hole 0.6 unplated: ""(3,0)
  silkscreen extent -4.47,-5.05 4.47,2.6, body extent -4.47,-5.48 4.47,1.42, height 3.31
MSOP-UN10_L [mm] "TSSOP, 10-Leads, Body 3x3mm, Pitch 0.5mm, IPC High Density"
  oval 1.45x0.25 smd: 1(-2.025,1) 2(-2.025,0.5) 3(-2.025,0) 4(-2.025,-0.5) 5(-2.025,-1) 6(2.025,-1) 7(2.025,-0.5) 8(2.025,0) 9(2.025,0.5) 10(2.025,1)
  silkscreen extent -2.15,-1.55 0.9,1.8, body extent -1.55,-1.55 1.55,1.55, height 1.1
OSC_CSTNE8M00G550000R0 [mm]
  rect 0.4x1.9 smd: 1(-1.2,0) 2(0,0) 3(1.2,0)
  silkscreen extent -2.32,-0.65 1.72,0.65, body extent -1.6,-0.65 1.6,0.65, height 0.8
SMD-0402C [mm]
  rect 0.55x0.55 smd: 1(0,0.584) 2(0,-0.584)
  silkscreen extent -0.25,0 0.25,0, body extent -0.25,-0.51 0.25,0.51, height 0.51
SOIC127P600X175-8N [mm]
  rrect25% 1.97x0.57 smd: 1(-2.475,1.905) 2(-2.475,0.635) 3(-2.475,-0.635) 4(-2.475,-1.905) 5(2.475,-1.905) 6(2.475,-0.635) 7(2.475,0.635) 8(2.475,1.905)
  silkscreen extent -4.35,-2.45 1.17,2.45, body extent -3,-2.45 3,2.45, height 1.75
SOT50P160X60-6N [mm]
  rrect8% 0.75x0.35 smd: 1(-0.69,0.5) 2(-0.69,0) 3(-0.69,-0.5) 4(0.69,-0.5) 5(0.69,0) 6(0.69,0.5)
  silkscreen extent -1.9,-0.85 0.65,0.85, body extent -0.8,-0.8 0.8,0.8, height 0.6
WL-SMCW_0603_150060xx75000 [mm] "SMD Mono-color Chip LED, body 1.60 x 0.80 mm"
  rect 0.8x0.8 smd: 1(-0.8,0) 2(0.8,0)
  silkscreen extent -1.55,-0.4 -1.4,0.4, body extent -0.8,-0.4 0.8,0.4, height 0.7
XCVR_DWM3000TR13 [mm]
  rect 2.45x1 smd: 1(-6.295,0.95) 2(-6.295,-0.45) 3(-6.295,-1.85) 4(-6.295,-3.25) 5(-6.295,-4.65) 6(-6.295,-6.05) 7(-6.295,-7.45) 8(-6.295,-8.85) 17(6.295,-8.85) 18(6.295,-7.45) 19(6.295,-6.05) 20(6.295,-4.65) 21(6.295,-3.25) 22(6.295,-1.85) 23(6.295,-0.45) 24(6.295,0.95)
  rect 1x2.45 smd: 9(-4.9,-11.145) 10(-3.5,-11.145) 11(-2.1,-11.145) 12(-0.7,-11.145) 13(0.7,-11.145) 14(2.1,-11.145) 15(3.5,-11.145) 16(4.9,-11.145)
  Keep-Out Layer region: 6.5,1.575 -6.5,1.575 -6.5,11.35 6.5,11.35
  Keep-Out Layer region: 6.5,1.575 -6.5,1.575 -6.5,11.35 6.5,11.35
  silkscreen extent -8.5,-11.35 6.5,11.35, body extent -6.5,-11.35 6.5,11.35, height 2.89
XDCR_MMC5603NJ [mm]
  round 0.23 smd mask+0.05: A1(-0.2,0.2) A2(0.2,0.2) B1(-0.2,-0.2) B2(0.2,-0.2)
  silkscreen extent -1.02,-0.64 0.64,0.64, body extent -0.41,-0.41 0.41,0.41, height 0.6

## Part data
C1 C32 C37 C42: library part CMP-03422-000306-1, "CAP CER 4.7UF 25V X7R 0805", Capacitance="4.7 uF", Manufacturer=Yageo, Package=CC0805-0.85, Temperature="-30°C to +85°C", Temperature Characteristic=X7R, Temperature Range High=+85°C, Temperature Range Low=-30°C, Tolerance=0.1, Voltage Rating="25 V", Automotive=No, Category=Cap, ComponentLink2Description=Datasheet, ComponentLink2URL=http://www.yageo.com/documents/recent/UPY-GPHC_Y5V_6.3V-to-50V_8.pdf, Device Class L1="Passive Components", Device Class L2=Capacitors, Device Class L3="Ceramic Capacitors", Digikey Description="CAP CER 4.7UF 25V X7R 0805", Footprint Url=http://www.yageo.com/exep/pages/download/literatures/UPY-C_GEN_24.pdf, Height=0.95mm, Ipc Land Pattern Name=CAPC200125X85, Lead Free=Yes, Manufacturer Part Number=CC0805KKX7R8BB475, Material=Ceramic, Mouser Description="Multilayer Ceramic Capacitors MLCC - SMD/SMT 4.7M pF 10% 25 Volts", Octopart=https://octopart.com/cc0805kkx7r8bb475-yageo-51849247, RoHS=TRUE
C2 C3 C4 C5 C6 C7 C8 C9 C10 C11 C12 C15 C17 C18 C20 C21 C22 C27_U_IMU1 C27_U_IMU2 C27_U_IMU3 C27_U_IMU4 C28_U_IMU1 C28_U_IMU2 C28_U_IMU3 C28_U_IMU4 C36: library part CMP-140-000687-1, "CAP CER 0.1UF 10V X5R 0402", Digi-Key Part Number=490-6297-1-ND, Manufacturer="Murata Electronics North America", Operating Temperature="-55°C ~ 85°C", Package / Case="0402 (1005 Metric)", Ratings=-, Temperature Coefficient=X5R, Tolerance=±10%, Voltage=10V, @ qty=0, Applications="General Purpose", Component Type=Standard, Datasheets=http://www.murata.com/~/media/webrenewal/support/library/catalog/products/capacitor/mlcc/c02e.pdf, Design Item ID=GRM155R61A104KA01J, Factory Stock=0, Features=-, Height - Seated (Max)=-, Image=//media.digikey.com/Renders/Murata%20Renders/ZRB-SERIES-0402.jpg, Lead Spacing=-, Minimum Quantity=1, Mounting Type="Surface Mount, MLCC", Packaging="Cut Tape (CT)", Part Number=GRM155R61A104KA01J, Part Status=Active, Pin Count=2, Quantity Available=24406, Series=GRM, Size / Dimension="0.039\" L x 0.020\" W (1.00mm x 0.50mm)", Source=capacitor_murata_0402$.SchLib, Thickness (Max)="0.022\" (0.55mm)", Unit Price (USD)=0.1
C13 C14: library part CMP-06035-028354-1, "Chip Multilayer Ceramic Capacitors for General Purpose, 0805, 2.2uF, X7R, 15%, 10%, 25V", Capacitance=2.2uF, Dielectric=X7R, Tolerance=10%, Voltage Rating (DC)=25V, Length=2mm, Thickness=1.25mm, Width=1.25mm
C16 C19: library part CMP-140-000297-1, "CAP CER 15PF 50V NP0 0402", Digi-Key Part Number=490-6200-1-ND, Manufacturer="Murata Electronics North America", Operating Temperature="-55°C ~ 125°C", Package / Case="0402 (1005 Metric)", Ratings=-, Temperature Coefficient="C0G, NP0", Tolerance=±1%, Voltage=50V, @ qty=0, Applications="General Purpose", Component Type=Standard, Datasheets=http://www.murata.com/~/media/webrenewal/support/library/catalog/products/capacitor/mlcc/c02e.pdf, Design Item ID=GRM1555C1H150FA01D, Factory Stock=0, Features=-, Height - Seated (Max)=-, Image=//media.digikey.com/Renders/Murata%20Renders/ZRB-SERIES-0402.jpg, Lead Spacing=-, Lead Style=-, Minimum Quantity=1, Mounting Type="Surface Mount, MLCC", Packaging="Cut Tape (CT)", Part Number=GRM1555C1H150FA01D, Part Status=Active, Pin Count=2, Quantity Available=187310, Series=GRM, Size / Dimension="0.039\" L x 0.020\" W (1.00mm x 0.50mm)", Source=capacitor_murata_0402$.SchLib, Thickness (Max)="0.022\" (0.55mm)", Unit Price (USD)=0.1
C29: library part CMP-06035-063009-1, "CAP CER 2.2UF 10V X5R 0402", Capacitance=2.2uF, Case Code (Imperial)=0402, Case Code (Metric)=1005, Dielectric=X5R, Max Operating Temperature=85°C, Min Operating Temperature=-55°C, Package Quantity=10000, Tolerance=10%, Voltage Rating=10V, Case/Package=0402, Depth=0.5mm, Height=0.5mm, Lead Free="Lead Free", Length=1mm, Material=Ceramic, Mount="Surface Mount", Packaging="Tape and Reel", REACH SVHC="No SVHC", RoHS Compliant=Yes, Termination=SMD/SMT, Thickness=0.022inch, Voltage Rating (DC)=10V, Weight=0.000212oz, Width=0.5mm
C30: library part CMP-03422-000804-1, "CAP CER 10000PF 10V X7R 0402", Capacitance="10 nF", Manufacturer=YAGEO, Package=CC0402, Temperature="-55°C to +125°C", Temperature Characteristic=X7R, Temperature Coefficient=30ppm/°C, Temperature Range High=+125°C, Temperature Range Low=-55°C, Tolerance=0.1, Voltage Rating="10 V", Automotive=No, Automotive Grade=NA, Category=Cap, ComponentLink2Description=Datasheet, ComponentLink2URL=http://www.yageo.com/documents/recent/UPY-GP_NP0_16V-to-50V_16.pdf, Device Class L1="Passive Components", Device Class L2=Capacitors, Device Class L3="Ceramic Capacitors", Digikey Description="CAP CER 10000PF 10V X7R 0402", Footprint Url=http://www.yageo.com/exep/pages/download/literatures/UPY-C_GEN_24.pdf, Height=0.55mm, Ipc Land Pattern Name=CAPC10050X50, Lead Free=Yes, Manufacturer Part Number=CC0402KRX7R6BB103, Material=Ceramic, Mouser Description="Multilayer Ceramic Capacitors MLCC - SMD/SMT 10nF 10V X7R 10%", Octopart=https://octopart.com/cc0402krx7r6bb103-yageo-26721868, RoHS=TRUE
C31 C41: library part CMP-13271-003098-1, "CL21 Series 0805 1uF 16V ±10% Tolerance X7R Multilayer Ceramic Chip Capacitor", Capacitance=1uF, Case Code (Imperial)=0805, Case Code (Metric)=2012, Dielectric=X7R, Max Operating Temperature=125°C, Min Operating Temperature=-55°C, Package Quantity=1, Tolerance=10%, Voltage=16V, Case/Package=0805, Contact Plating=Tin, Depth=1.25mm, Height=1.25mm, Lead Free="Lead Free", Length=2mm, Mount="Surface Mount", Packaging="Tape and Reel", Radiation Hardening=No, Thickness=0.053inch, Voltage Rating=16V, Voltage Rating (DC)=16V, Width=0.049inch
C33: library part CMP-2000-05448-2, "CAP CER 10UF 10V X5R 0603", Capacitance=10uF, Manufacturer=Murata, Package=GRM18-0.15, Temperature="-55°C to +85°C", Temperature Characteristic=X5R, Temperature Coefficient=15%, Temperature Range High=+85°C, Temperature Range Low=-55°C, Tolerance=10%, Voltage Rating=10V, Automotive=No, Category=Cap, ComponentLink2Description=Datasheet, ComponentLink2URL=https://search.murata.co.jp/Ceramy/image/img/A01X/G101/ENG/GRM188R61A106KE69-01A.pdf, Device Class L1="Passive Components", Device Class L2=Capacitors, Device Class L3="Ceramic Capacitors", Digikey Description="CAP CER 10UF 10V X5R 0603", Height=0.95mm, Lead Free=Yes, Manufacturer Part Number=GRM188R61A106KE69D, Material=Ceramic, Mouser Description="Multilayer Ceramic Capacitors MLCC - SMD/SMT 0603 10uF 10volts X5R + - 10%", Octopart=https://octopart.com/grm188r61a106ke69d-murata-22851381, RoHS=TRUE
C34: library part CMP-06035-039952-1, "Chip Multilayer Ceramic Capacitors for General Purpose, 0805, 10uF, X7S, 22%, 10%, 25V", Capacitance=10uF, Case Code (Imperial)=0805, Case Code (Metric)=2012, Dielectric=X7S, Dielectric Material=Ceramic, Max Operating Temperature=125°C, Min Operating Temperature=-55°C, Package Quantity=3000, Tolerance=10%, Voltage=25V, Case/Package=0805, Depth=1.25mm, Dissipation Factor=0.025%, Height=1.25mm, Lead Free="Lead Free", Length=2mm, Mount="Surface Mount", Packaging="Tape and Reel", REACH SVHC="No SVHC", Termination=SMD/SMT, Thickness=0.057inch, Voltage Rating=25V, Voltage Rating (DC)=25V, Weight=0.000335oz, Width=0.049inch
C35 C38: library part CMP-2008-04580-2, "CAP CER 0.1UF 25V X5R 0402", Capacitance=100nF, Case Code (Imperial)=0402, Case Code (Metric)=1005, Dielectric=X5R, Max Operating Temperature=85°C, Min Operating Temperature=-55°C, Package Quantity=10000, Tolerance=10%, Voltage=25V, Case/Package=0402, Depth=0.5mm, Height=0.5mm, Lead Free="Lead Free", Lead/Base Style=Bayonet, Length=1mm, Material=Ceramic, Mount="Surface Mount", Packaging="Cut Tape", Radiation Hardening=No, REACH SVHC="No SVHC", RoHS Compliant=Yes, Series=GRM, Termination=Standard, Thickness=0.022inch, Voltage Rating=25V, Voltage Rating (DC)=25V, Weight=0.000388oz, Width=0.5mm
C39 C40: library part CMP-2000-06362-2, "CAP CER 47UF 16V X5R 1210", Capacitance=47uF, Case Code (Imperial)=1210, Case Code (Metric)=3225, Dielectric=X5R, Max Operating Temperature=85°C, Min Operating Temperature=-55°C, Package Quantity=1, Tolerance=10%, Voltage=16V, Case/Package=1210, Depth=2.5mm, Height=2.5mm, Lead Free="Lead Free", Length=3.2mm, Material=Ceramic, Mount="Surface Mount", Number of Pins=2, Packaging="Cut Tape", Radiation Hardening=No, REACH SVHC="No SVHC", RoHS Compliant=Yes, Termination=SMD/SMT, Thickness=0.106inch, Voltage Rating=16V, Voltage Rating (DC)=16V, Width=0.098inch
D1 D7 D8: library part CMP-1426-00003-4, "Led, Blue, 470 Nm, 3.2 V, 30 Ma, 145 Mcd Rohs Compliant: Yes", Case Code (Imperial)=0603, Case Code (Metric)=1608, Color=Blue, Forward Current=100mA, Forward Voltage=3.2V, Max Junction Temperature (Tj)=95°C, Max Operating Temperature=85°C, Max Reverse Voltage (DC)=5V, Min Operating Temperature=-40°C, Power Dissipation=105mW, Test Current=20mA, Case/Package=0603, Dominant Wavelength=470nm, Height=700µm, Length=1.6mm, Lens Style="Clear, Rectangular", Luminous Intensity=145mcd, Mount="Surface Mount", Packaging="Tape and Reel", Peak Wavelength=465nm, REACH SVHC=Unknown, Reverse Voltage=5V, RoHS=Compliant, Viewing Angle=140°, Wavelength=470nm, Width=800µm
D2 D3: library part CMP-1426-00001-4, "LED Low-Power Uni-Color Red 630nm 2V 2-Pin Chip 0603(1608Metric) T/R", Case Code (Imperial)=0603, Case Code (Metric)=1608, Color=Red, Forward Current=100mA, Forward Voltage=2V, Max Junction Temperature (Tj)=95°C, Max Operating Temperature=85°C, Max Reverse Voltage (DC)=5V, Min Operating Temperature=-40°C, Power Dissipation=72mW, Test Current=20mA, Case/Package=0603, Dominant Wavelength=625nm, Height=700µm, Length=1.6mm, Lens Style="Clear, Rectangular", Luminous Intensity=250mcd, Mount="Surface Mount", Packaging="Tape and Reel", Peak Wavelength=630nm, REACH SVHC=Unknown, Reverse Voltage=5V, RoHS=Compliant, Viewing Angle=140°, Wavelength=625nm, Width=800µm
D4 D5: library part CMP-1426-00006-7, "WURTH ELEKTRONIK - 150060VS75000 - LED, Green, SMD, 0603, 30 mA, 2 V, 570 nm", Case Code (Imperial)=0603, Case Code (Metric)=1608, Color=Green, Forward Current=100mA, Forward Voltage=2V, Max Junction Temperature (Tj)=95°C, Max Operating Temperature=85°C, Max Reverse Voltage (DC)=5V, Min Operating Temperature=-40°C, Power Dissipation=72mW, Test Current=20mA, Case/Package=0603, Dominant Wavelength=570nm, Height=700µm, Length=1.6mm, Lens Style="Clear, Rectangular", Luminous Intensity=40mcd, Mount="Surface Mount", Number of Pins=2, Packaging="Tape and Reel", Peak Wavelength=572nm, REACH SVHC=Unknown, Reverse Voltage=5V, RoHS=Compliant, Viewing Angle=140°, Wavelength=570nm, Width=800µm
D6: library part CMP-0303-00003-3, "DIODE SCHOTTKY 40V 1A SOD123", Average Rectified Current=1A, Capacitance=110pF, Case/Package=SOD-123-2, Forward Voltage=450mV, Max Forward Surge Current (Ifsm)=25A, Max Operating Temperature=125°C, Max Power Dissipation=450mW, Max Repetitive Reverse Voltage (Vrrm)=40V, Min Operating Temperature=-65°C, Package Quantity=3000, Peak Reverse Current=50uA, Contact Plating=Tin, Current Rating=1A, Element Configuration=Single, Forward Current=1A, Height=1.25mm, Lead Free="Lead Free", Length=2.85mm, Max Reverse Voltage (DC)=40V, Number of Pins=2, Output Current=1A, Packaging="Tape and Reel", Peak Non-Repetitive Surge Current=25A, Polarity=Standard, Radiation Hardening=No, REACH SVHC="No SVHC", Termination=SMD/SMT, Voltage Rating (DC)=40V, Weight=0.000353oz, Width=1.7mm
J1: library part CMP-2000-05150-2, "CONN MICRO SD CARD PUSH-PUSH R/A", Current Rating=500mA, Flammability Rating="UL94 V-0", Max Operating Temperature=85°C, Max Voltage Rating (AC)=125V, Min Operating Temperature=-25°C, Package Quantity=1, Connector Type=Connector, Contact Material="Copper Alloy", Contact Plating=Gold, Depth=15.95mm, Gender=Female, Height=1.68mm, Housing Material=Polymer, Lead Free="Lead Free", Length=15.95mm, Max Current Rating=500mA, Mount="Surface Mount", Number of Contacts=8, Number of Positions=8, Number of Rows=1, Orientation="Right Angle", Packaging="Tape and Reel", Pitch=1.1mm, Radiation Hardening=No, REACH SVHC="No SVHC", Termination=SMD/SMT, Voltage Rating=125V, Width=13.85mm
J2: library part CMP-003-000003-4, "USB-C (USB TYPE-C) USB 2.0 Receptacle Connector 24 (16+8 Dummy) Position Surface Mount, Right Angle; Through Hole", Package=None, Availability=Unavailable, Component Type=Standard, Design Item ID=DX07S016JA1R1500, MP=DX07S016JA1R1500, Pin Count=18, Price=None, Source=DX07S016JA1R1500.SchLib
J3: library part CMP-1502-01329-3, Contact Resistance=20mΩ, Current Rating=3A, Operating Supply Voltage=250V, Gender=Female, Lead Pitch=2.54mm, NexarPartId=61924725, Number of Pins=8, Orientation=Vertical, RoHS=Non-Compliant
J4: library part CMP-2000-06895-2, "Through Hole Right Angle DC Power Jack, 2.5 A, 2 mm Center Pin, 3 Position, -25 to 85 degC, RoHS, Bulk", Current Rating=2.5A, Flammability Rating=UL94V-0, Insulation Resistance=50MOhms, Manufacturer=CUIInc., Operating Temperature Range=-25Cto+85C, Package Description="3-Pin Through Hole Device, Body 14.4 x 9 mm, Height 11 mm", Voltage Rating=24V, Brand=CUI, Connector Type=DCPowerJack, Contact Gender=Male, Contact Material=Copper, Contact Plating=Nickel, Datasheet URL=http://www.cui.com/product/resource/pj-002a.pdf, Datasheet Version="Rev. 1.03, 04/2016", Factory Pack Quantity=500, Housing Material=PolybutyleneTerephthalate(PBT), Inside Contact Diameter=2mm, Manufacturer URL=http://www.cui.com/, Mounting Angle=Right, Mounting Style=ThroughHole, Mounting Technology=ThroughHole, Outside Contact Diameter=6.5mm, Package Reference=PJ-002A, Product=Jacks, Product Category=DCPowerConnectors, RoHS=True, Termination Style=ThroughHole
J5 J6: library part CMP-17439-000048-1, "CONN HEADER SMD R/A 5POS 1.25MM", Color=Natural, Current Rating=1A, Max Operating Temperature=85°C, Min Operating Temperature=-25°C, Voltage Rating=50V, Connector Type="Outer Shroud Contact", Contact Material=Bronze, Contact Plating=Tin, Contact Type="Outer Shroud Contact", Fastening Type=Ramp, Housing Color=Natural, Housing Material=Nylon, Lead Free="Lead Free", Mount="Surface Mount", Number of Contacts=5, Number of Positions=5, Number of Rows=1, Orientation="Right Angle", Packaging="Tape and Reel", Pitch=0.049inch, REACH SVHC="No SVHC", Series=GH, Termination=Solder, Voltage Rating (AC)=50V, Wire/Cable Gauge=26AWG
J7: library part CMP-02766-001414-1, "CONN HEADER SMD 14POS 1.27MM", Contact Material=Bronze, Contact Plating=Gold, Gender=Male, Lead Free="Lead Free", Number of Contacts=14, Number of Rows=2, Pitch=1.27mm, RoHS Compliant=Yes, Termination=Solder
L1: library part CMP-2000-07146-2, "FIXED IND 15UH 5A 27 MOHM SMD", Case/Package=1260, Current Rating=5A, DC Resistance (DCR)=27mR, Frequency=17.6MHz, Inductance=15uH, Inductance Tolerance=20%, Max Operating Temperature=125°C, Min Operating Temperature=-40°C, Package Quantity=600, Resistance=27MR, Resistor Type=Wirewound, Saturation Current=4.6A, Test Frequency=100kHz, Core Material=Ferrite, DC Current=5A, Depth=12.8mm, Height=6mm, Height - Seated (Max)=0.256inch, Length=12.5mm, Material=Steel, Max DC Current=5A, Military Standard=Not, Mount="Surface Mount", Number of Pins=2, Packaging="Tape and Reel", Q Factor=25, REACH SVHC="No SVHC", RMS Current (Irms)=5A, RoHS Compliant=Yes, Sample Rate (Hz)=100kHz, Self Resonant Frequency=17.6MHz, Series=SRR1260, Shielding=Shielded, Termination=SMD/SMT, Tolerance=20%, Width=12.5mm
P1: library part CMP-1502-01064-4, "THT Vertical Pin Header WR-PHD, Pitch 2.54 mm, Single Row, 4 pins", Color=Black, Contact Resistance=20mΩ, Current Rating=3A, Max Operating Temperature=105°C, Min Operating Temperature=-40°C, Operating Supply Voltage=250V, Connector Type="Male Pin", Contact Material=Gold, Contact Mating Length=5.9944mm, Contact Plating=Gold, Gender=Male, Height=8.89mm, Lead Free="Lead Free", Lead Pitch=2.54mm, Mount="Through Hole", Number of Contacts=4, Number of Pins=4, Number of Positions=4, Number of Rows=1, Orientation=Vertical, Packaging=Bulk, Pitch=2.54mm, RoHS=Compliant, Termination=Solder, Voltage Rating=250V
Q1: library part CMP-2000-06247-1, "P-Channel Specified Power Trench(R) MOSFET, 1.8 V, -55 to 150 degC, 3-Pin SSOT, RoHS, Tape and Reel", Continuous Drain Current Id=2.4A, Current Temperature=25°C, Drain Source Voltage Vds=20V, Manufacturer="Fairchild Semiconductor", On Resistance Rds(on)=52mohm, Operating Temperature Max=150°C, Operating Temperature Min=-55°C, Operating Temperature Range=-55°Cto+150°C, Package / Case=SOT-23, Package Description="3-Pin Small Outline Transistor, Body 2.92 x 1.4 mm, Pitch 0.95 mm", Package Reference=SSOT3L, Package Version="Rev. 3, 05/2015", Power Dissipation Pd=500mW, Pulse Current Idm=10A, Rds(on) Test Voltage Vgs=-4.5V, Threshold Voltage Vgs Typ=-800mV, Voltage Vds Typ=-20V, Voltage Vgs th Max=-1.5V, Current Id Max=2.4A, Datasheet URL=https://www.fairchildsemi.com/datasheets/FD/FDN304P.pdf, Datasheet Version="Rev. C, 01/2001", External Depth=2.5mm, External Length / Height=1.12mm, External Width=3.05mm, Full Power Rating Temperature=25°C, Manufacturer URL=https://www.fairchildsemi.com/, Mounting Technology=SurfaceMount, No. of Pins=3, Package URL=https://www.fairchildsemi.com/package-drawings/MA/MA03B.pdf, Reel Quantity=3000, SMD Marking=304P, SVHC=NoSVHC(19-Dec-2012), Tape Width=8mm, Termination Type=SMD, Transistor Case Style=SOT-23, Transistor Polarity=PChannel, Voltage Vds=20V, Voltage Vgs Max=-800mV, Voltage Vgs Rds on Measurement=-4.5V
R1 R2 R3 R4 R5 R6 R7 R8 R9 R10 R11 R12 R13 R14 R15 R16 R17 R18 R19 R20 R21 R22 R23 R24 R25 R26 R27 R28 R29 R30 R31 R32 R33 R34 R35 R36 R37 R38 R39 R40 R41: library part CMP-009-00183-1, Design Item ID="Generic RES 0402", Source=Schlib1.SchLib
SW1 SW2 SW3: library part CMP-2100-03586-2, "SWITCH TACTILE SPST-NO 0.05A 12V", Contact Current Rating=50mA, Contact Resistance=100mR, Insulation Resistance=100MR, Max Operating Temperature=70°C, Max Voltage Rating (DC)=12V, Min Operating Temperature=-25°C, Operating Force=1.5N, Package Quantity=1, Ratings="Dust Proof", Actuator Length=0.4mm, Actuator Type=Standard, Contact Material=Silver, Current Rating=50mA, Depth=2.5mm, Electrical Life=200000Cycles, Height=1.2mm, Illumination Type=Non-Illuminated, Lead Free="Lead Free", Length=4mm, Max Current Rating=50mA, Mechanical Life=200000Cycles, Mount="Surface Mount", Orientation=Straight, Packaging="Tape and Reel", Switch Function=Off-Mom, Switch Travel=0.15mm, Termination=SMD/SMT, Throw Configuration=SPST, Voltage Rating (DC)=12V, Weight=0.000776oz, Width=3mm
U1: library part CMP-12105-000148-1, "IC MCU 32BIT 1MB FLASH 144LQFP"
U2: library part CMP-023-000028-1, Design Item ID=CH340E, Source=Schlib1.SchLib
U4_U_IMU1 U4_U_IMU2 U4_U_IMU3 U4_U_IMU4: library part CMP-036-000000-1, "Description", Manufacturer_Name="Bosch Sensortec", Component Type=Standard, Copyright="Copyright (C) 2025 Ultra Librarian. All rights reserved.", Design Item ID=BMI323, Manufacturer_Part_Number=BMI323, Pin Count=14, RefDes=RefDes, Source=BMI323.SchLib, Type=Type
U5: library part CMP-038-000000-1, Package=None, Availability=Unavailable, Component Type=Standard, Design Item ID=M24C64-RMN6TP, MP=M24C64-RMN6TP, Pin Count=8, Price=None, Source=M24C64-RMN6TP.SchLib
U6: library part CMP-004-00043-1, "17V Clamp 5A (8/20Âµs) Ipp Tvs Diode Surface Mount SOT-666", Case/Package="SOT-666 STMicroelectronics", Check_prices=https://www.snapeda.com/parts/USBLC6-2P6/STMicroelectronics/view-part/?ref=eda, Component Type=Standard, Design Item ID=USBLC6-2P6, MF=STMicroelectronics, MP=USBLC6-2P6, Pins=6, SnapEDA_Link=https://www.snapeda.com/parts/USBLC6-2P6/STMicroelectronics/view-part/?ref=snap, Source=USBLC6-2P6.SchLib
U7: library part CMP-044-000000-1, "Magnetoresistive Sensor X, Y, Z Axis 4-WLP (0.82x0.82)", Package="UFBGA-4 Memsic Inc.", Availability="In Stock", Check_prices=https://www.snapeda.com/parts/MMC5603NJ/Memsic+Inc./view-part/?ref=eda, Component Type=Standard, Design Item ID=MMC5603NJ, MF="Memsic Inc.", MP=MMC5603NJ, Pin Count=4, Price=None, Purchase-URL=https://pricing.snapeda.com/search/part/MMC5603NJ/?ref=eda, SnapEDA_Link=https://www.snapeda.com/parts/MMC5603NJ/Memsic+Inc./view-part/?ref=snap, Source=MMC5603NJ.SchLib
U8: library part CMP-04910-000076-1, "2.7-19V 130MA-2A SURGE CLAMPING"
U9: library part CMP-018-000009-1, "SIMPLE SWITCHERÂ® synchronous buck converter with 4.3V-to-60V, 2.5A and low quiescent current 6-SOT-23-THIN -40 to 150", Manufacturer_Name="Texas Instruments", Component Type=Standard, Copyright="Copyright (C) 2025 Ultra Librarian. All rights reserved.", Design Item ID=LMR51625XDDCR, Manufacturer_Part_Number=LMR51625XDDCR, Pin Count=6, RefDes=RefDes, Source=LMR51625XDDCR.SchLib, Type=TYPE
U10 U12: library part CMP-12153-000006-1, "IC REG LINEAR 3.3V 1.2A SOT223", Dropout Voltage=350mV, Manufacturer=STMicroelectronics, Max Junction Temp=+125°C, Max Supply Voltage=18V, Min Supply Voltage=2.6V, Nominal Supply Current=250uA, Output Current=2A, Output Voltage=3.3V, Package=SOT223-0046067, Temperature="-40°C to +125°C", Temperature Range Low=-40°C, Accuracy Percentage=2%, Automotive=No, Category=IC, ComponentLink2Description=Datasheet, ComponentLink2URL=https://www.st.com/resource/en/datasheet/ldl1117.pdf, Device Class L1="Integrated Circuits (ICs)", Device Class L2="Power Management ICs", Device Class L3="Voltage Regulators - Linear", Digikey Description="IC REG LINEAR 3.3V 1.2A SOT223", Height=1.9mm, Ipc Land Pattern Name=SOT230P700X190-4, Lead Free=Yes, Manufacturer Part Number=LDL1117S33R, Mouser Description="LDL1117 Series 1.2 A 3.3 V High PSRR LDO Linear Voltage Regulator-SOT-223", Number Of Outputs=1, Octopart=https://octopart.com/ldl1117s33r-stmicroelectronics-81876163, Output Type=Fixed, RoHS=TRUE, Standoff Height=0.02mm, Temperature Range High=+125°C
U13: library part CMP-046-000000-1, "802.15.4, Bluetooth, Cellular UWB, ZigbeeÂ® Transceiver Module 6.25GHz ~ 8.25GHz Integrated, Ceramic Patch Surface Mount", Package=None, Check_prices=https://www.snapeda.com/parts/DWM3000TR13/Qorvo/view-part/?ref=eda, Component Type=Standard, Design Item ID=DWM3000TR13, MF=Qorvo, MP=DWM3000TR13, Pin Count=24, SnapEDA_Link=https://www.snapeda.com/parts/DWM3000TR13/Qorvo/view-part/?ref=snap, Source=DWM3000TR13.SchLib
Y1: library part CMP-001-00084-2, "8 MHz Ceramic Resonator Built in Capacitor 33 pF Â±0.2% 40 Ohms -40Â°C ~ 85Â°C Surface Mount", Case/Package="SMD-3 Murata", Check_prices=https://www.snapeda.com/parts/CSTNE8M00G550000R0/Murata+Electronics+North+America/view-part/?ref=eda, Component Type=Standard, Design Item ID=CSTNE8M00G550000R0, MF="Murata Electronics", MP=CSTNE8M00G550000R0, Pins=3, SnapEDA_Link=https://www.snapeda.com/parts/CSTNE8M00G550000R0/Murata+Electronics+North+America/view-part/?ref=snap, Source=CSTNE8M00G550000R0.SchLib
Y2: library part CMP-0447-00001-4, "Crystal 32.768kHz ±20ppm (Tol) 12.5pF FUND 70kΩ 2-Pin CSMD T/R", Case/Package=CSMD, ESR (Equivalent Series Resistance)=70kR, Frequency=32.768kHz, Frequency Tolerance=20ppm, Load Capacitance=12.5pF, Max Operating Temperature=85°C, Min Operating Temperature=-40°C, Operating Frequency="32.768 kHz", Package Quantity=3000, Depth=1.5mm, Height=0.9mm, Lead Free="Lead Free", Length=3.2mm, Number of Pins=2, Packaging="Tape and Reel", Radiation Hardening=No, REACH SVHC="No SVHC", RoHS Compliant=Yes, Series=ABS07, Series Resistance=70kR, Termination=SMD/SMT, Tolerance=20ppm, Width=1.5mm

## Free pads (board coordinates)
  round 4.3 hole 4.3 unplated: 2(61.25,129.5) 2(61.25,52.5) 2(126.5,129.5) 2(126.5,52.5)

## Via types
v1: diameter 0.508, hole 0.254, Top Layer to Bottom Layer, tented both sides, 302 vias

## Nets (pads, with @x,y where several pads share a name; then routed paths per layer and width w, separated by ;. In a path a pad name is that pad's centre, name@x,y a point inside that pad or via, vN(x,y) a via of type N, cw(c..) or ccw(c..) an arc to the next point about the centre after c; other vN are vias at no path point)
3V3: C1.1 C2.1 C3.1 C4.1 C5.1 C6.1 C7.1 C8.1 C9.1 C10.1 C11.1 C12.1 C17.1 C18.2 C20.1 C27_U_IMU1.1 C27_U_IMU2.1 C27_U_IMU3.1 C27_U_IMU4.1 C28_U_IMU1.1 C28_U_IMU2.1 C28_U_IMU3.1 C28_U_IMU4.1 C29.1 C32.1 J1.4 J5.5 J6.5 J7.3 P1.1 R2.1 R6.2 R7.1 R8.1 R9.2 R10.2 R11.2 R12.2 R13.2 R20.2 R36.2 R39.1 R41.2 SW2.1 SW3.2 U1.6 U1.17 U1.30 U1.32 U1.33 U1.39 U1.52 U1.62 U1.72 U1.84 U1.95 U1.108 U1.121 U1.131 U1.144 U4_U_IMU1.5 U4_U_IMU1.8 U4_U_IMU2.5 U4_U_IMU2.8 U4_U_IMU3.5 U4_U_IMU3.8 U4_U_IMU4.5 U4_U_IMU4.8 U5.8 U7.B1 U12.2 U12.4 | length 143.7
  Top Layer w0.127: C32.1@85.1,97.163 85.316,97.379